# Altium PCB InvControlCardLayout.PcbDoc (part 1 of 2)
Units mil, origin at the board's own origin, x right, y up, seen from the top; angles counter-clockwise.
Board outline 9055.12 x 6692.91 mil, 4 copper layers (Top, GND PLANE, POWER PLANE, Bottom), stack 25.5 mil thick; 291 components, 194 nets, 954 pads, 275 vias.
Unrouted connection lines stored in the file: 3.
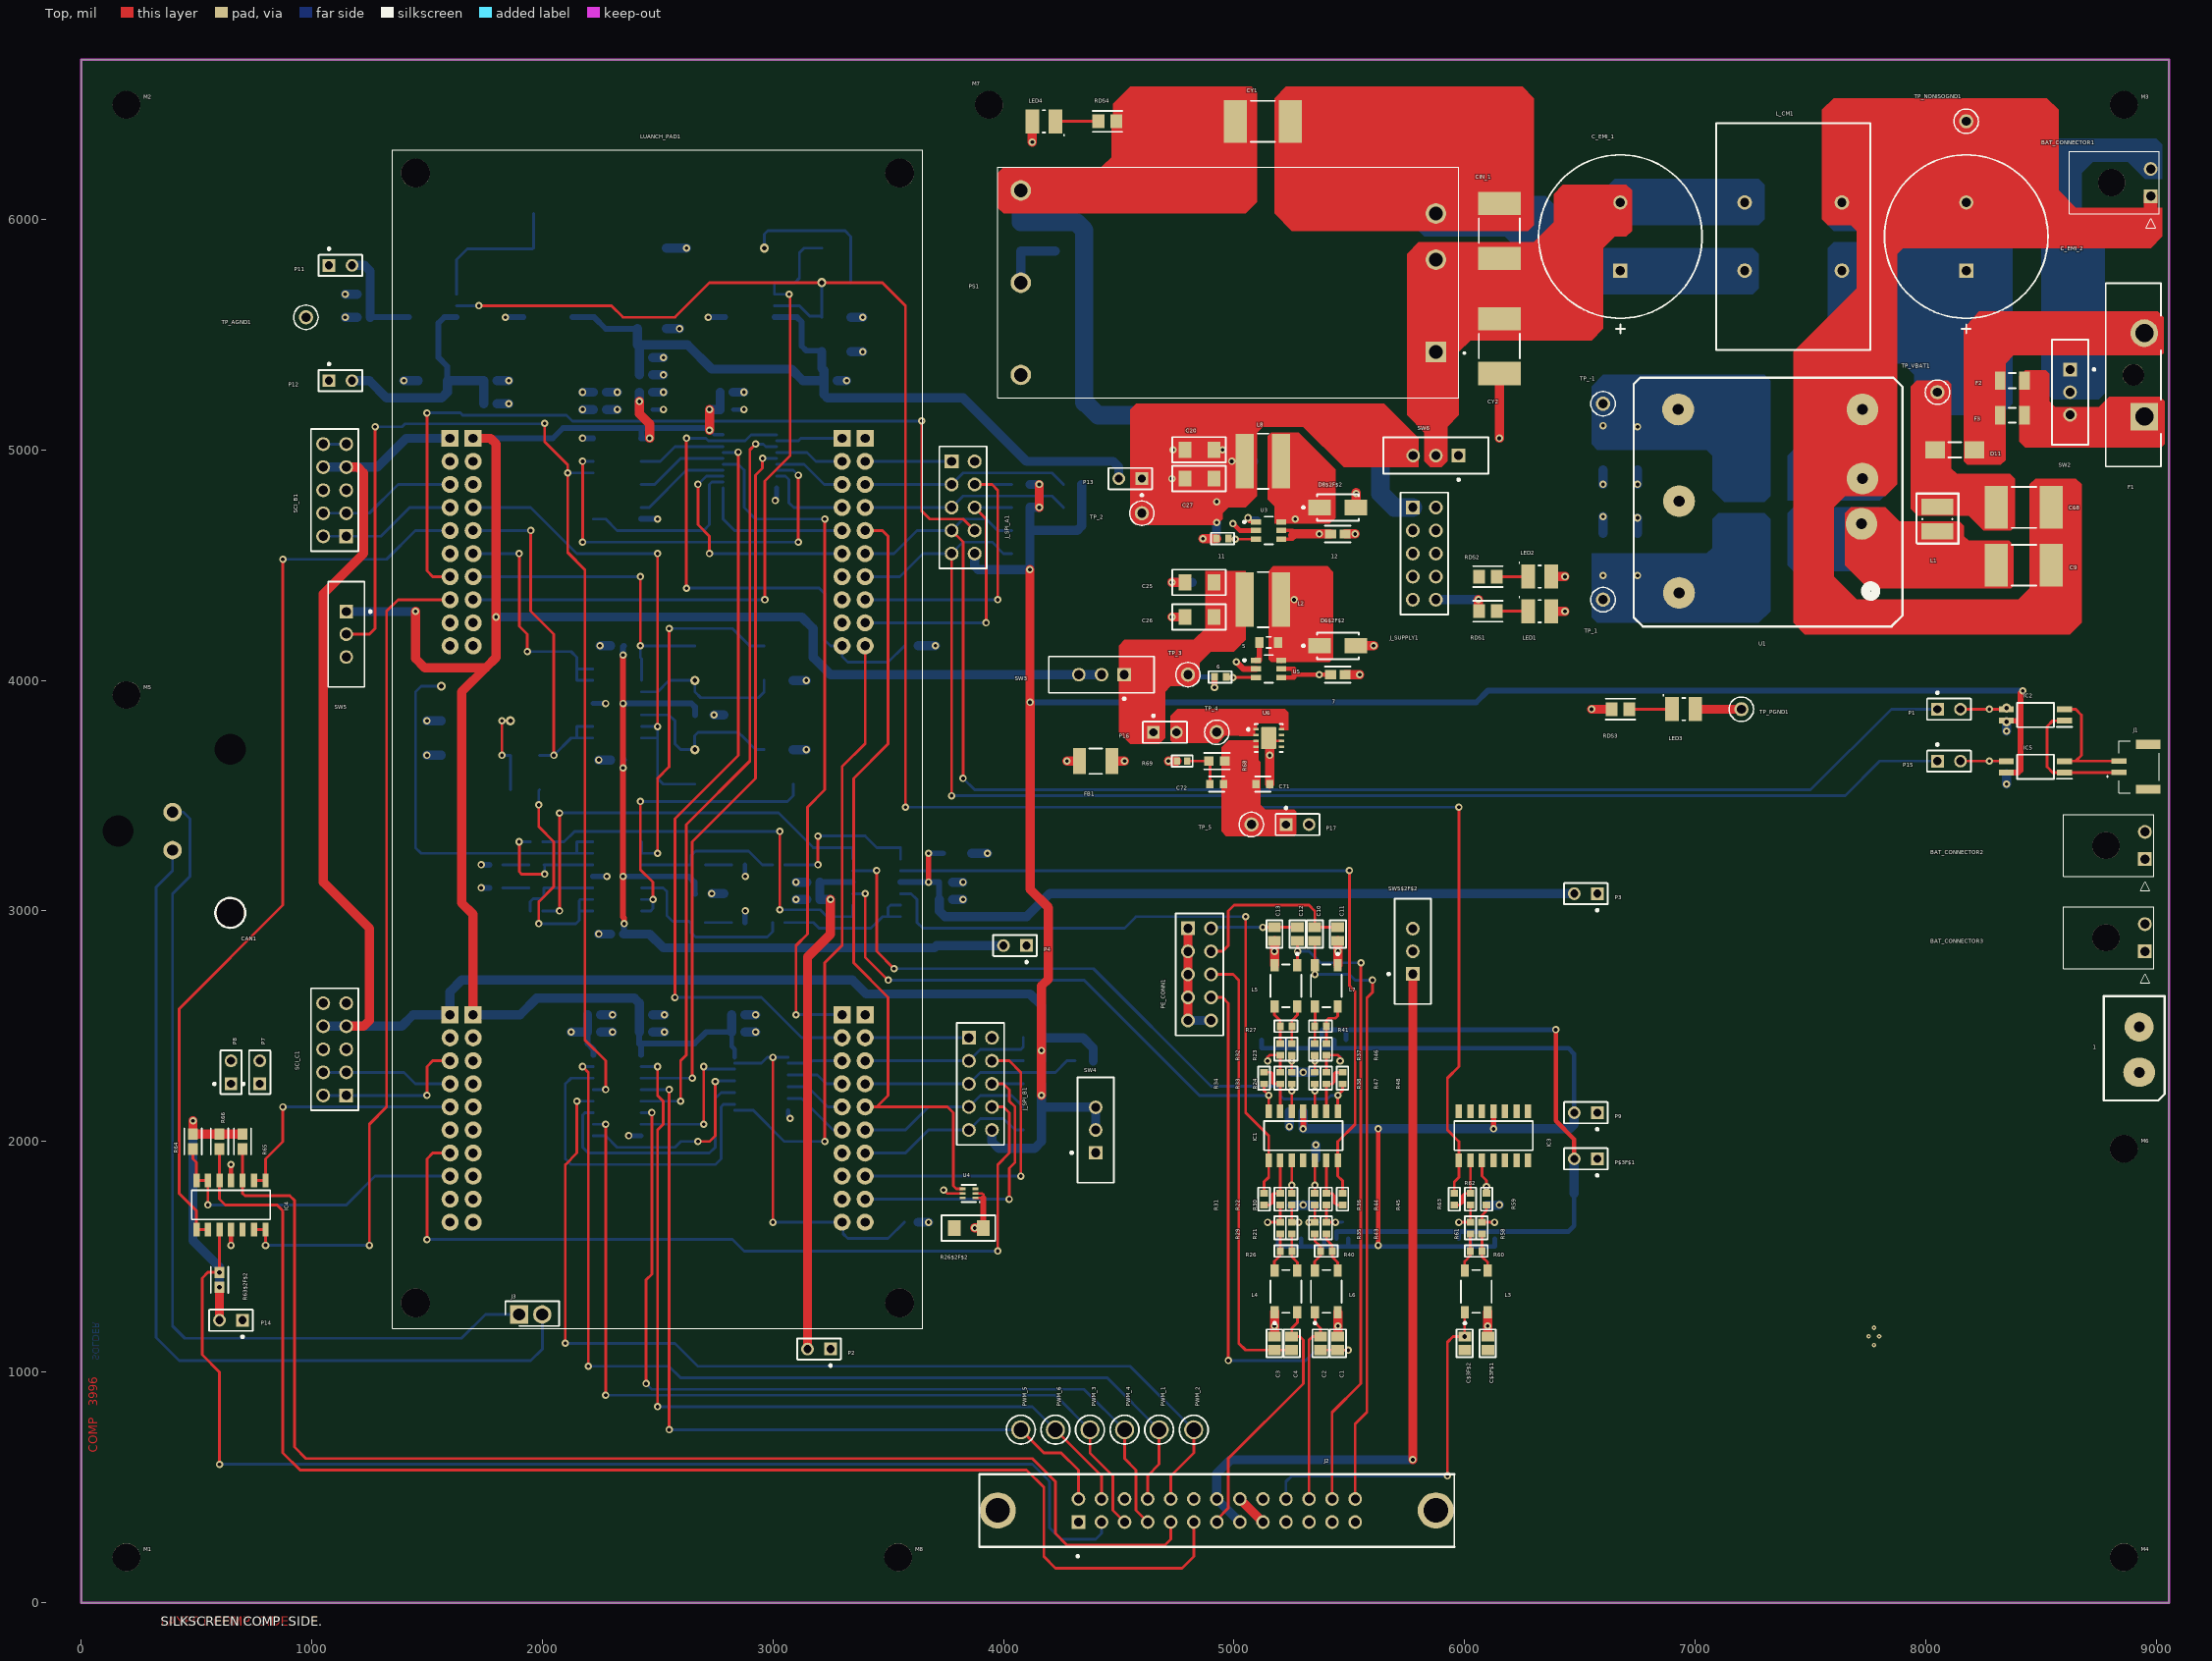
[diagram p0: Top view]
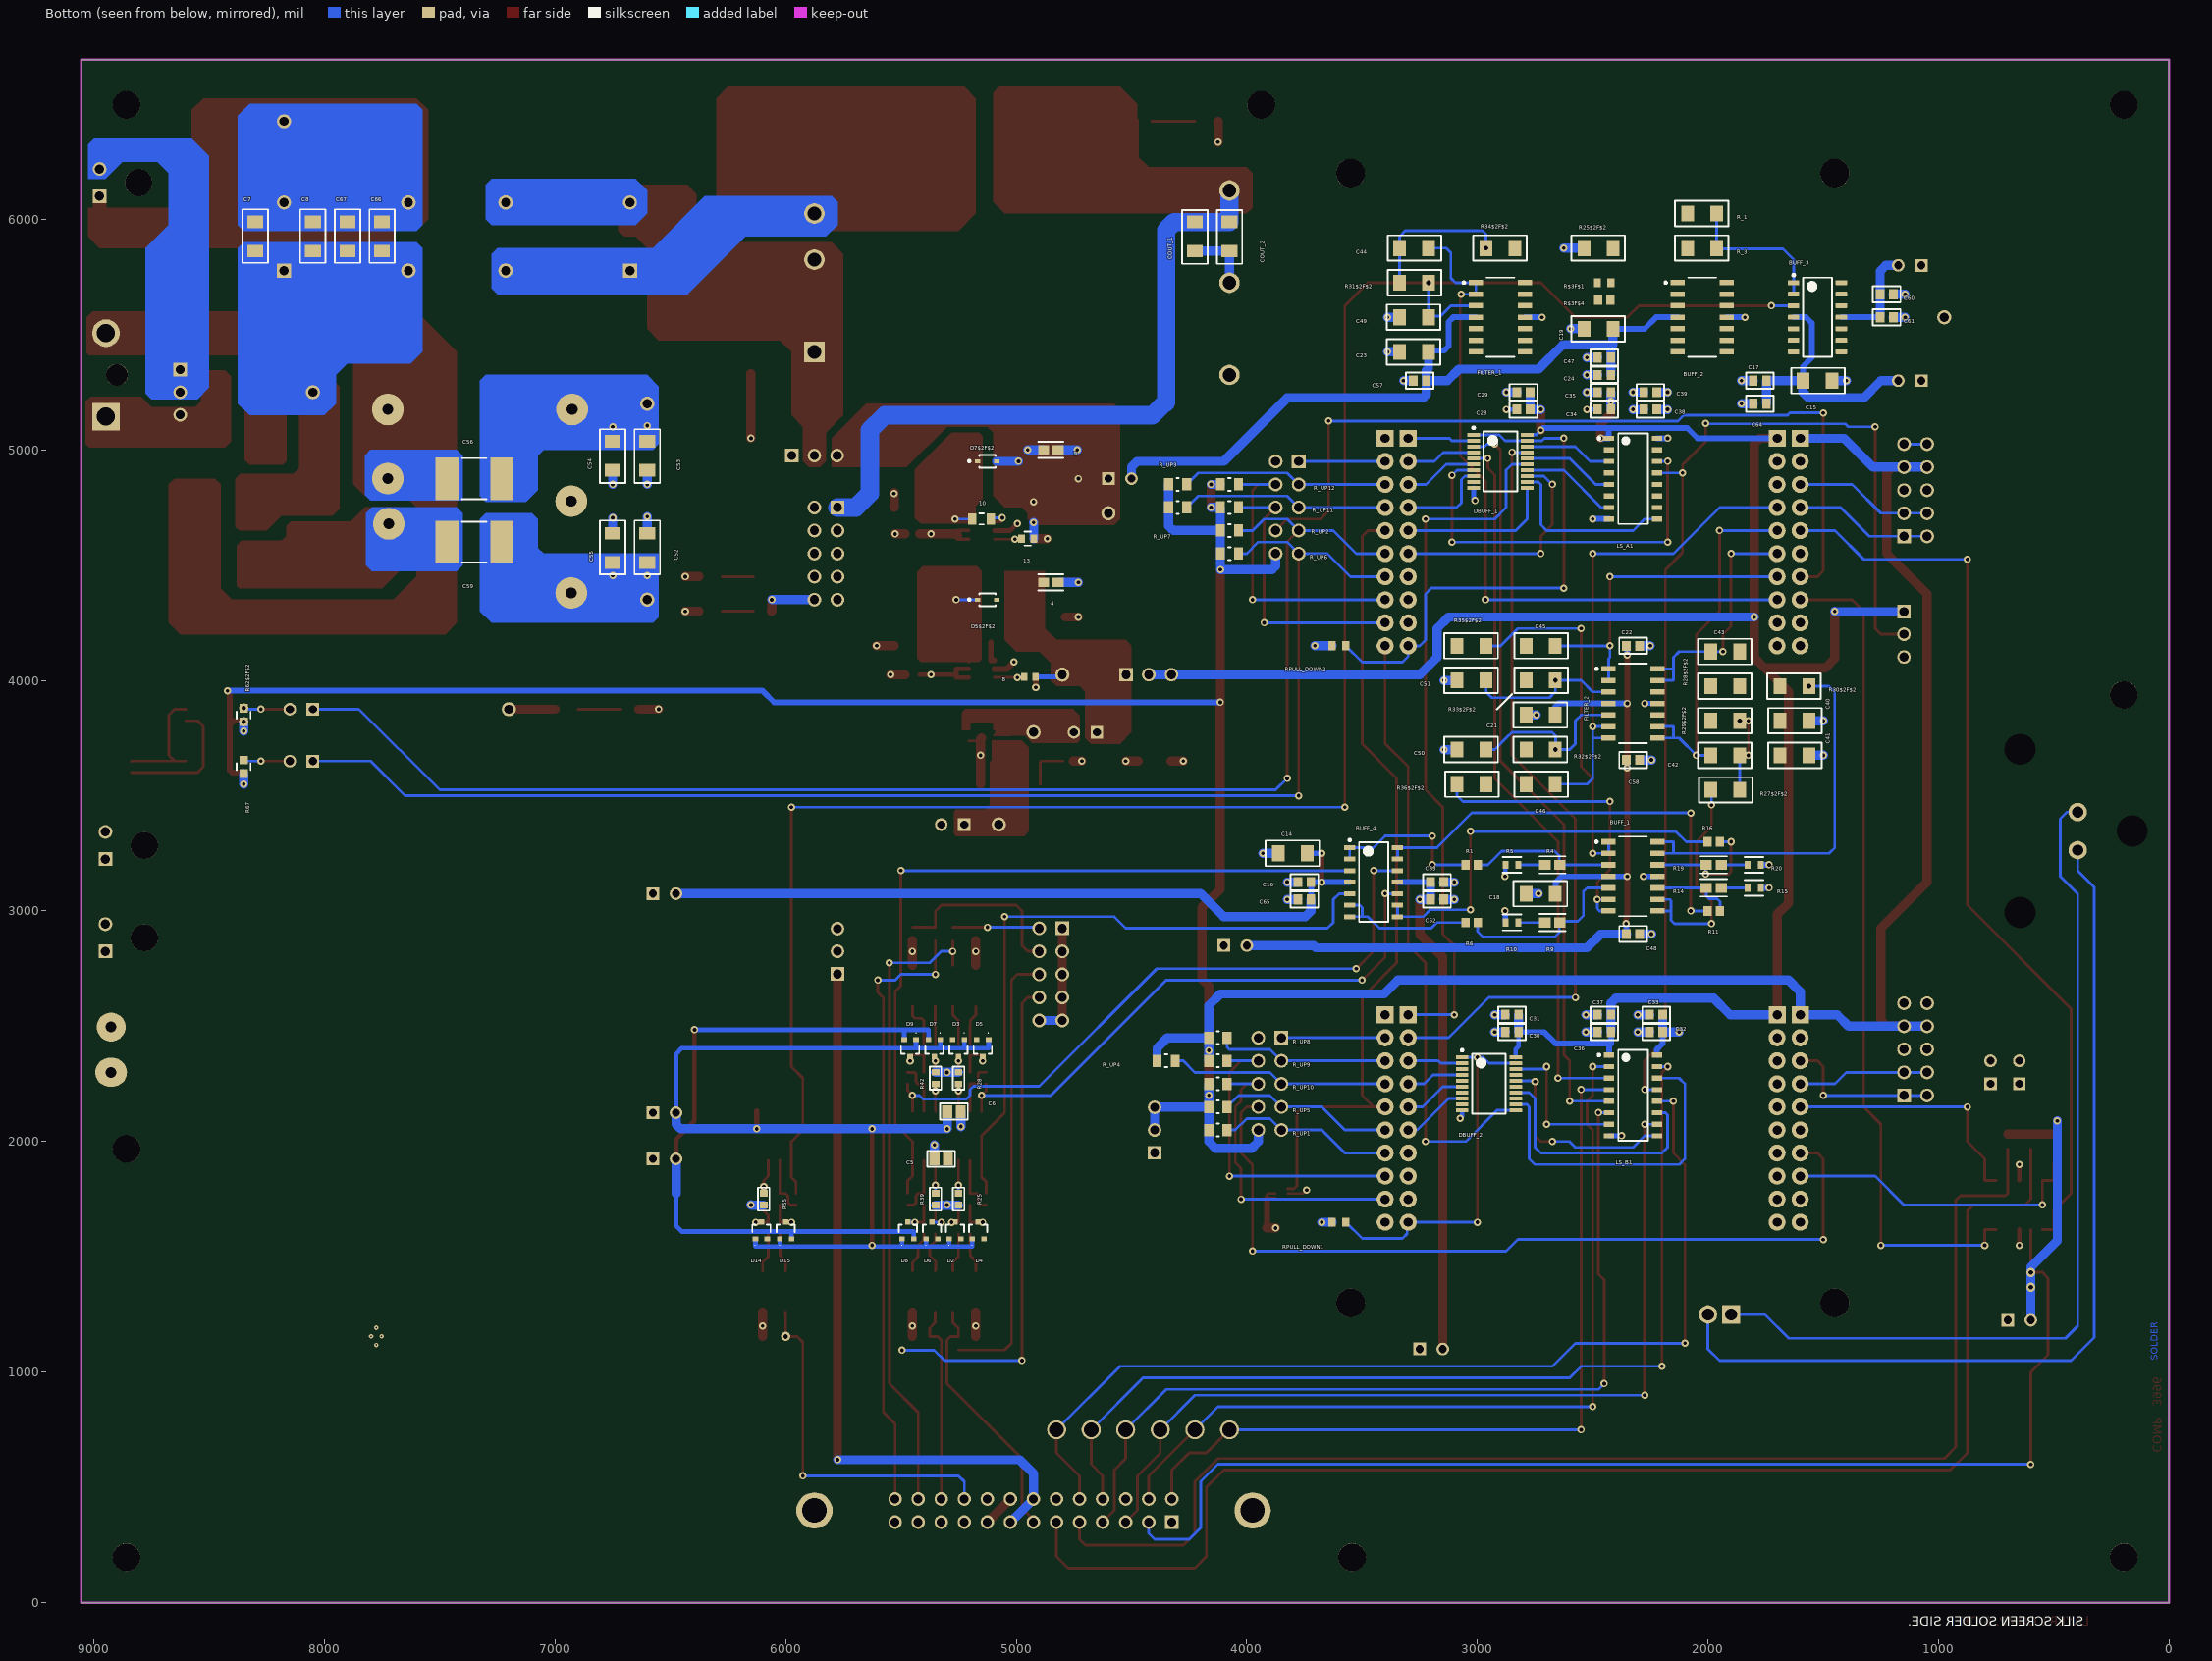
[diagram p1: Bottom view, seen from below]
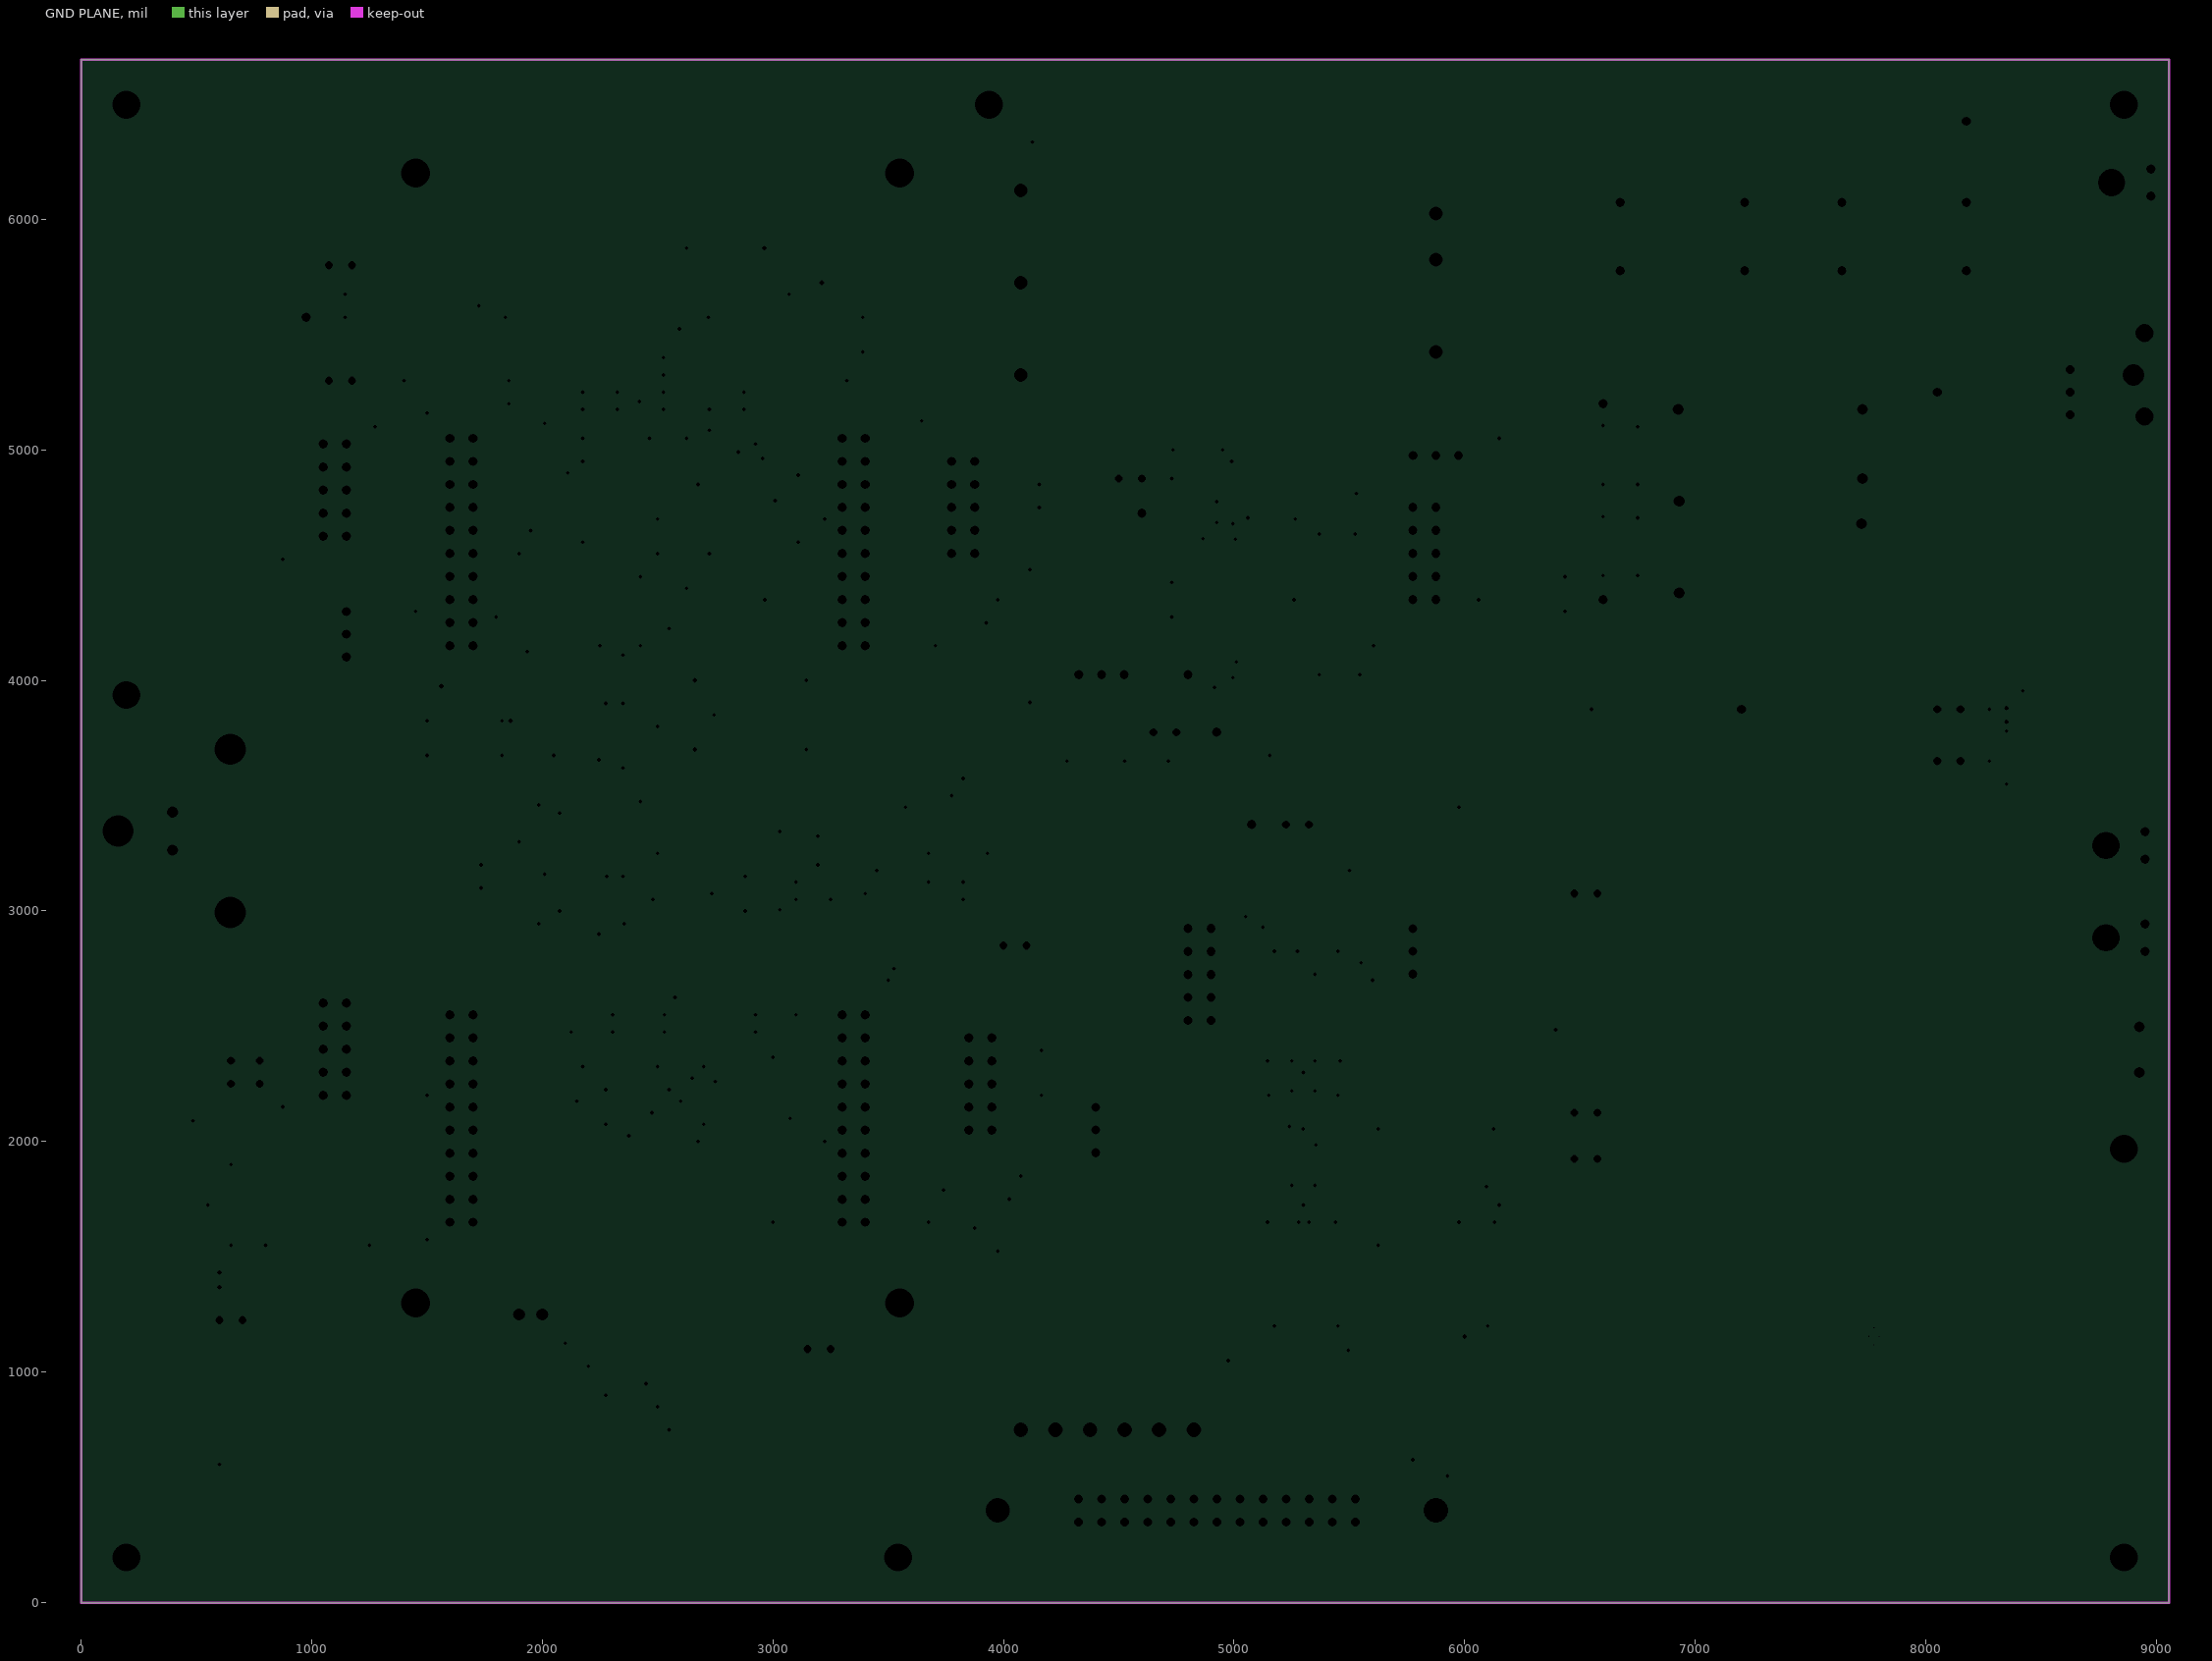
[diagram p2: GND PLANE, clearances drawn from the general rule]
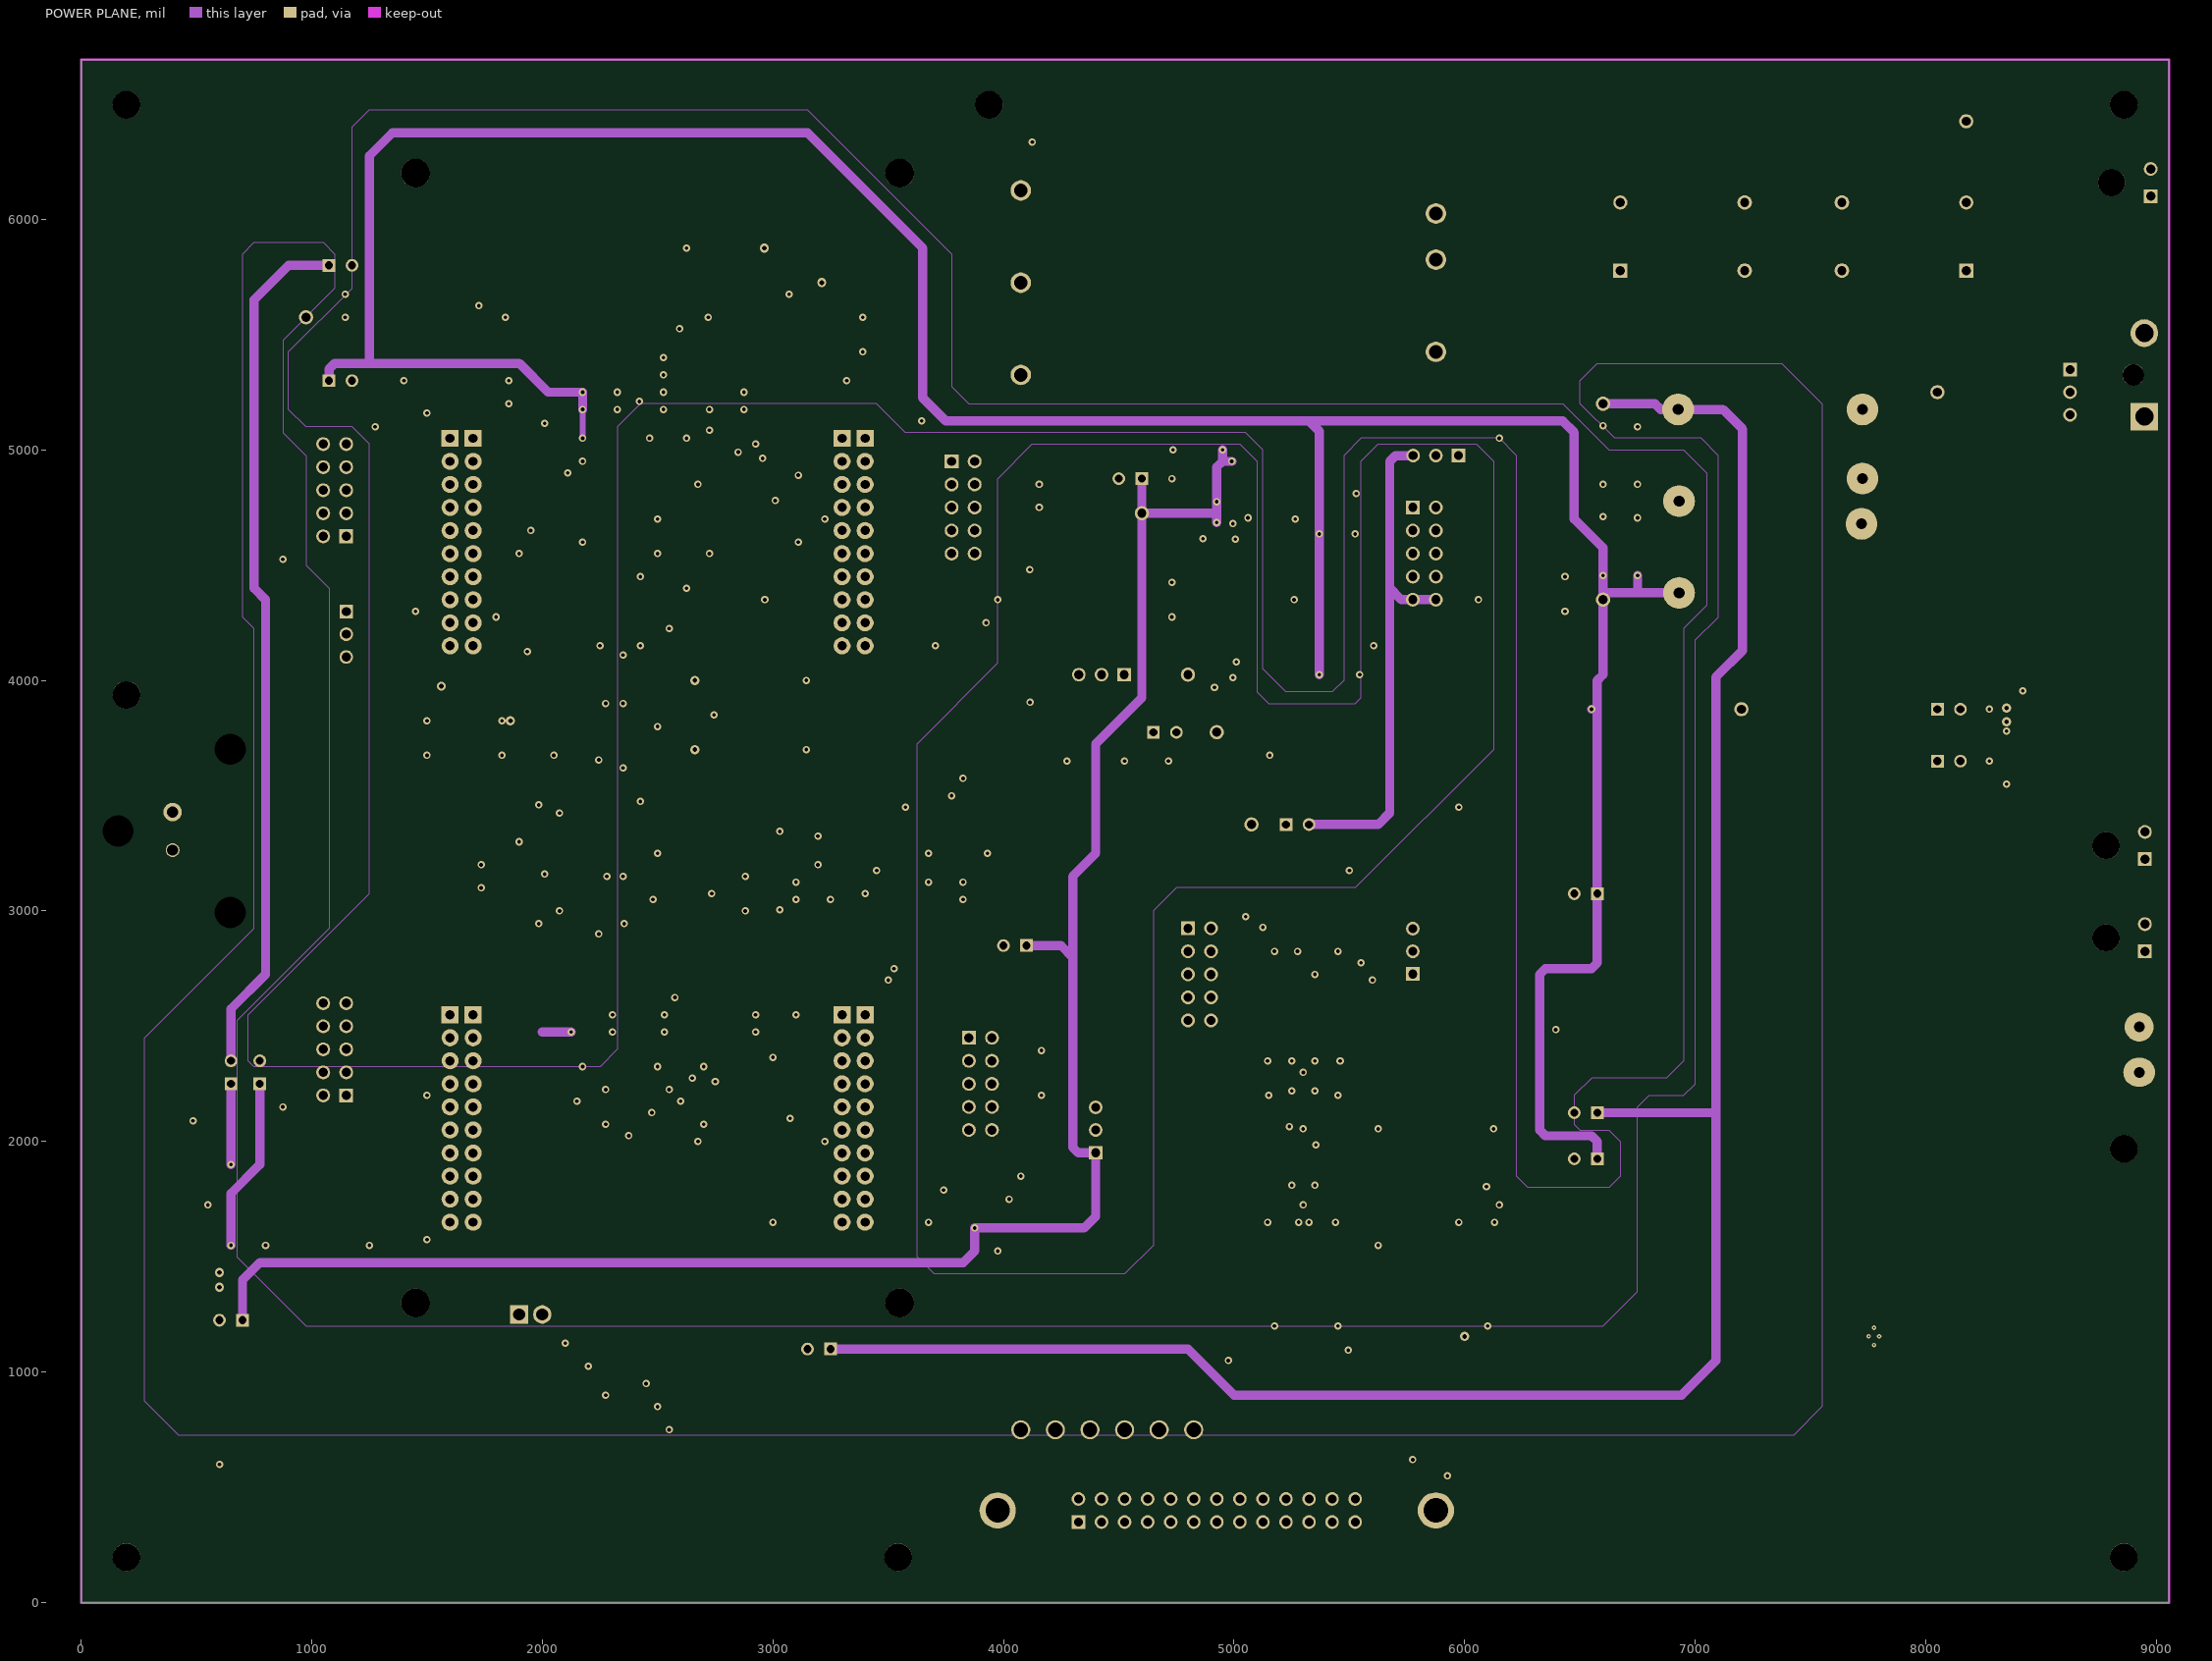
[diagram p3: POWER PLANE]

## Layer stack, top to bottom
Solder Mask Top: solder mask 0.4, Solder Resist, Dk 3.5
Top: signal copper 1.4
GND PLANE: plane copper 1.35
Dielectric2: dielectric 10, FR-4, Dk 4.3
POWER PLANE: signal copper 1.35
Dielectric3: dielectric 10, FR-4, Dk 4.3
Bottom: signal copper 1.4
Solder Mask Bottom: solder mask 0.4, Solder Resist, Dk 3.5

## Board outline
0,0 9055.12,0 9055.12,6692.91 0,6692.91

## Design rules (kind name [scope] priority, off if disabled: settings)
Clearance "Clearance - Default - DEFAULT - Via" [IsVia vs IsVia] p1: gap=12 ignorepadtopadclearanceinfootprint=FALSE
Clearance "Clearance - Default - DEFAULT- SMD" [IsVia vs IsSMTPin] p2: gap=12 ignorepadtopadclearanceinfootprint=FALSE
Clearance "Clearance - Default - DEFAULT - Net" [All] p3: gap=10 ignorepadtopadclearanceinfootprint=FALSE except(0: Arc-Hole Track-Hole SMDPad-Hole THPad-Hole Via-Hole Fill-Hole Poly-Hole Region-Hole Text-Hole; 20: SMDPad-Fill SMDPad-Poly SMDPad-Region THPad-Fill THPad-Poly THPad-Region Via-Fill Via-Poly Via-Region)
ComponentClearance "ComponentClearance - Default - DEFAULT" [All] p1: gap=10 collisioncheckmode=3 verticalgap=10 showdistances=FALSE
FanoutControl Fanout_SOIC [IsSOIC] p1: bgadir=Out bgaviamode=Centered fanoutstyle=Auto fanoutdirection=Alternating viagrid=1 // Fanout_SOIC (Default Rule)
FanoutControl Fanout_Small [(CompPinCount < 5)] p2: bgadir=Out bgaviamode=Centered fanoutstyle=Auto fanoutdirection=OutThenIn viagrid=1 // Fanout_Small (Default Rule)
FanoutControl Fanout_LCC [IsLCC] p3: bgadir=Out bgaviamode=Centered fanoutstyle=Auto fanoutdirection=Alternating viagrid=1 // Fanout_LCC (Default Rule)
FanoutControl Fanout_BGA [IsBGA] p4: bgadir=Out bgaviamode=Centered fanoutstyle=Auto fanoutdirection=Alternating viagrid=1 // Fanout_BGA (Default Rule)
HoleToHoleClearance "HoleToHoleClearance - Default - DEFAULT" [All] p1: gap=10 allowstackedmicrovias=TRUE
Length "Default Length" [All] p1: maxlimit=50000 minlimit=0
MaxMinImpedance "Default Impedance" [All] p1: minimum=50.00 maximum=150.0
ParallelSegment "Default Parallel Segment Adjasent" [All] p1: limit=1000 gap=200
ParallelSegment "Default Parallel Segment Same Layer" [All] p2: limit=1000 gap=200
PlaneClearance [All] p1: clearance=20
PlaneConnect "Default PlaneConnect" [All] p1: planeconnectstyle=Relief reliefexpansion=20 reliefentries=4 reliefconductorwidth=10 reliefairgap=10
PolygonConnect "PolygonConnect - Default SMT" [IsSMTPin] p1: connectstyle=Relief reliefconductorwidth=10 reliefentries=4 polygonreliefangle="45 Angle" airgapwidth=10
PolygonConnect "PolygonConnect - Default Pad" [All] p2: connectstyle=Relief reliefconductorwidth=10 reliefentries=4 polygonreliefangle="45 Angle" airgapwidth=10
RoutingLayers "RoutingLayers - Default - DEFAULT" [All] p1: top layer_v5=TRUE mid layer 1_v5=TRUE bottom layer_v5=TRUE
RoutingPriority "RoutingPriority - Default - DEFAULT" [All] p1: routingpriority=0
RoutingTopology "Default Routing Topology" [All] p1: topology=Shortest
RoutingVias "RoutingVias - Default - DEFAULT" [All] p1: holewidth=16 width=32 viastyle="Through Hole" minholewidth=16 minwidth=32 maxholewidth=16 maxwidth=32
SMDToCorner "SMDToCorner - Default - DEFAULT" [All] p1: distance=120000
SolderMaskExpansion "SolderMaskExpansion from CAM settings" [All] p1: expansion=5 istentingtop=FALSE
Width "Width - Net - PGND" [InNet('PGND')] p1: maxlimit=100 minlimit=10 preferedwidth=40
Width "Width - NetClass - ClearanceClass_2(RuleSet)" [InNetClass('ClearanceClass_2(RuleSet)')] p2: maxlimit=100 minlimit=10 preferedwidth=40
Width "Width - NetClass - ClearanceClass_4(RuleSet)" [InNetClass('ClearanceClass_4(RuleSet)')] p3: maxlimit=100 minlimit=10 preferedwidth=20
Width "Default Width" [All] p4: maxlimit=100 minlimit=10 preferedwidth=12
19 further rules are at their usual default settings.

## Classes and differential pairs
net class ClearanceClass_2(RuleSet): 3V3 3V3_C 3V3_L 3V3_L1 5V 5V_C 15V 15V_OUT 24V 24V_IPM +15_L +15_L1 -15_L -15_L1 -15V AGND GND_AUX NON_ISOGND V_BAT V_BAT_IN V_PROT
net class ClearanceClass_4(RuleSet): VCC+ VCC-

## Components (designator, comment, footprint, x,y, rotation, side; value= is the part's Value field where it differs from the comment)
1 "5.08MM_PITCH_CON2" 5.08MM_PITCH_CON2 8925,2300 r90 top
4 "FP-GRM188-0_1-E0_2_0_55-IPC_A" FP-GRM188-0_1-E0_2_0_55-IPC_A 4850,4425 r0 bottom
5 "FP-CGA3E-0_3-0_1-IPC_A" FP-CGA3E-0_3-0_1-IPC_A 5150,4165 r0 top
6 "RESC1609X55X30LL15T15" RESC1609X55X30LL15T15 4940,4015 r0 top
7 "FP-GRM188-0_1-E0_2_0_55-IPC_A" FP-GRM188-0_1-E0_2_0_55-IPC_A 5450,4025 r180 top
8 "RESC1608X55X30LL15T15" RESC1608X55X30LL15T15 4940,4015 r0 bottom
9 "FP-GRM188-0_1-E0_2_0_55-IPC_A" FP-GRM188-0_1-E0_2_0_55-IPC_A 4850,5000 r0 bottom
10 "FP-CGA3E-0_3-0_1-IPC_A" FP-CGA3E-0_3-0_1-IPC_A 5150,4700 r0 bottom
11 "RESC1609X55X30LL15T15" RESC1609X55X30LL15T15 4950,4615 r0 top
12 "FP-GRM188-0_1-E0_2_0_55-IPC_A" FP-GRM188-0_1-E0_2_0_55-IPC_A 5450,4635 r180 top
13 "RESC1608X55X30NL15T15$2F$2" RESC1608X55X30NL15T15$2F$2 4950,4615 r0 bottom
BAT_CONNECTOR1 "215760-YY02" 215760-YY02 8975,6100 r270 top
BAT_CONNECTOR2 "215760-YY02" 215760-YY02 8950,3225 r270 top
BAT_CONNECTOR3 "215760-YY02" 215760-YY02 8950,2825 r270 top
BUFF_1 "FP-D0014A-MFG" FP-D0014A-MFG 2325,3150 r180 bottom
BUFF_2 "FP-D0014A-MFG" FP-D0014A-MFG 2025,5575 r180 bottom
BUFF_3 "D0014A_L" D0014A_L 1525,5575 r180 bottom
BUFF_4 "D0014A_L" D0014A_L 3450,3125 r180 bottom
C1 "C0805" C0805 5450,1125 r90 top
C2 "C0805" C0805 5375,1125 r270 top
C3 "C0805" C0805 5175,1125 r90 top
C4 "C0805" C0805 5250,1125 r270 top
C5 "C0805" C0805 5325,1925 r0 bottom
C6 "C0805" C0805 5270,2130 r180 bottom
C7 "1206" 1206 8300,5925 r90 bottom
C8 "1206" 1206 8050,5925 r90 bottom
C9 "1812" 1812 8425,4500 r0 top
C10 "C0805" C0805 5350,2900 r90 top
C11 "C0805" C0805 5450,2900 r270 top
C12 "C0805" C0805 5275,2900 r90 top
C13 "C0805" C0805 5175,2900 r270 top
C14 "1206" 1206 3800,3250 r0 bottom
C15 "1206" 1206 1525,5300 r180 bottom
C16 "CAPC1608X92X38ML15T08" CAPC1608X92X38ML15T08 3750,3125 r180 bottom
C17 "CAPC1608X92X38ML15T08" CAPC1608X92X38ML15T08 1775,5300 r180 bottom
C18 "1206" 1206 2725,3075 r0 bottom
C19 "1206" 1206 2475,5525 r0 bottom
C20 "1206" 1206 4850,5000 r180 top
C21 "1206" 1206 2725,3850 r0 bottom
C22 "CAPC1608X92X38ML15T08" CAPC1608X92X38ML15T08 2325,4150 r0 bottom
C23 "1206" 1206 3275,5425 r0 bottom
C24 "CAPC1608X92X38ML15T08" CAPC1608X92X38ML15T08 2450,5325 r180 bottom
C25 "1206" 1206 4850,4425 r180 top
C26 "1206" 1206 4850,4275 r180 top
C27 "1206" 1206 4850,4875 r180 top
C28 "CAPC1608X92X38ML15T08" CAPC1608X92X38ML15T08 2800,5175 r180 bottom
C29 "CAPC1608X92X38ML15T08" CAPC1608X92X38ML15T08 2800,5250 r180 bottom
C30 "CAPC1608X92X38ML15T08" CAPC1608X92X38ML15T08 2850,2475 r180 bottom
C31 "CAPC1608X92X38ML15T08" CAPC1608X92X38ML15T08 2850,2550 r180 bottom
C32 "CAPC1608X92X38ML15T08" CAPC1608X92X38ML15T08 2225,2475 r180 bottom
C33 "CAPC1608X92X38ML15T08" CAPC1608X92X38ML15T08 2225,2550 r180 bottom
C34 "CAPC1608X92X38ML15T08" CAPC1608X92X38ML15T08 2450,5175 r180 bottom
C35 "CAPC1608X92X38ML15T08" CAPC1608X92X38ML15T08 2450,5250 r180 bottom
C36 "CAPC1608X92X38ML15T08" CAPC1608X92X38ML15T08 2450,2475 r180 bottom
C37 "CAPC1608X92X38ML15T08" CAPC1608X92X38ML15T08 2450,2550 r180 bottom
C38 "CAPC1608X92X38ML15T08" CAPC1608X92X38ML15T08 2250,5175 r180 bottom
C39 "CAPC1608X92X38ML15T08" CAPC1608X92X38ML15T08 2250,5250 r180 bottom
C40 "1206" 1206 1625,3825 r180 bottom
C41 "1206" 1206 1625,3675 r180 bottom
C42 "1206" 1206 1925,3675 r0 bottom
C43 "1206" 1206 1925,4125 r0 bottom
C44 "1206" 1206 3275,5875 r180 bottom
C45 "1206" 1206 2725,4150 r180 bottom
C46 "1206" 1206 2725,3550 r180 bottom
C47 "CAPC1608X92X38ML15T08" CAPC1608X92X38ML15T08 2450,5400 r180 bottom
C48 "CAPC1608X92X38ML15T08" CAPC1608X92X38ML15T08 2325,2900 r0 bottom
C49 "1206" 1206 3275,5575 r0 bottom
C50 "1206" 1206 3025,3700 r0 bottom
C51 "1206" 1206 3025,4000 r0 bottom
C52 "1206" 1206 6600,4575 r90 bottom
C53 "1206" 1206 6600,4975 r270 bottom
C54 "1206" 1206 6750,4975 r270 bottom
C55 "1206" 1206 6750,4575 r90 bottom
C56 "1812" 1812 7350,4875 r180 bottom
C57 "CAPC1608X92X38ML15T08" CAPC1608X92X38ML15T08 3250,5300 r180 bottom
C58 "CAPC1608X92X38ML15T08" CAPC1608X92X38ML15T08 2325,3655 r0 bottom
C59 "1812" 1812 7350,4600 r180 bottom
C60 "CAPC1608X92X38ML15T08" CAPC1608X92X38ML15T08 1225,5675 r0 bottom
C61 "CAPC1608X92X38ML15T08" CAPC1608X92X38ML15T08 1225,5575 r0 bottom
C62 "CAPC1608X92X38ML15T08" CAPC1608X92X38ML15T08 3175,3050 r0 bottom
C63 "CAPC1608X92X38ML15T08" CAPC1608X92X38ML15T08 3175,3125 r0 bottom
C64 "CAPC1608X92X38ML15T08" CAPC1608X92X38ML15T08 1775,5200 r180 bottom
C65 "CAPC1608X92X38ML15T08" CAPC1608X92X38ML15T08 3750,3050 r180 bottom
C66 "1206" 1206 7750,5925 r90 bottom
C67 "1206" 1206 7900,5925 r90 bottom
C68 "1812" 1812 8425,4750 r0 top
C71 "FP-CC0603-DA-MFG" FP-CC0603-DA-MFG 5125,3550 r0 top
C72 "FP-CC0603-0_9-MFG" FP-CC0603-0_9-MFG 4925,3550 r180 top
C$3F$1 "C0805" C0805 6100,1125 r90 top
C$3F$2 "C0805" C0805 6000,1125 r270 top
C_EMI_1 "CAPPR80-750-2000X1800X2200" CAPPR80-750-2000X1800X2200 6675,5925 r90 top
C_EMI_2 "CAPPR80-750-2000X1800X2200" CAPPR80-750-2000X1800X2200 8175,5925 r90 top
CAN1 "PCBCOMPONENT_1" PCBCOMPONENT_1 393.7,3346.46 r90 top
CIN_1 "1812" 1812 6150,5950 r90 top
COUT_1 "1206" 1206 4225,5925 r270 bottom
COUT_2 "1206" 1206 4075,5925 r270 bottom
CY1 "1812" 1812 5125,6425 r180 top
CY2 "1812" 1812 6150,5450 r270 top
D2 "BAV99W115" BAV99W115 5265,1615 r180 bottom
D3 "BAV99W115" BAV99W115 5250,2405 r0 bottom
D4 "BAV99W115" BAV99W115 5165,1615 r180 bottom
D5 "BAV99W115" BAV99W115 5145,2405 r0 bottom
D5$2F$2 "FP-SOD323-MFG" FP-SOD323-MFG 5125,4350 r180 bottom
D6 "BAV99W115" BAV99W115 5365,1615 r180 bottom
D6$2F$2 "FP-SMA-MFG" FP-SMA-MFG 5450,4150 r0 top
D7 "BAV99W115" BAV99W115 5355,2405 r0 bottom
D7$2F$2 "FP-SOD323-MFG" FP-SOD323-MFG 5125,4950 r180 bottom
D8 "BAV99W115" BAV99W115 5470,1615 r180 bottom
D8$2F$2 "FP-SMA-MFG" FP-SMA-MFG 5450,4750 r0 top
D9 "BAV99W115" BAV99W115 5460,2405 r0 bottom
D11 "DIODE" DIODE 8125,5000 r180 top
D14 "BAV99W115" BAV99W115 6105,1615 r180 bottom
D15 "BAV99W115" BAV99W115 6000,1615 r180 bottom
DBUFF_1 "PW0020A_N" PW0020A_N 2900,4950 r180 bottom
DBUFF_2 "PW0020A_N" PW0020A_N 2950,2250 r180 bottom
F1 "FP-178_6164_0001-MFG" FP-178_6164_0001-MFG 8900,5325 r90 top
F2 "FP-0466-MFG" FP-0466-MFG 8375,5300 r180 top
F3 "FP-0466-MFG" FP-0466-MFG 8375,5150 r180 top
FB1 "FP-FBMH3225-MFG" FP-FBMH3225-MFG 4400,3650 r0 top
FILTER_1 "FP-D0014A-MFG" FP-D0014A-MFG 2900,5575 r180 bottom
FILTER_2 "FP-D0014A-MFG" FP-D0014A-MFG 2325,3900 r180 bottom
IC1 "SOIC127P600X175-14N" SOIC127P600X175-14N 5300,2025 r90 top
IC2 "SOIC127P700X210-4N" SOIC127P700X210-4N 8475,3850 r180 top
IC3 "SOIC127P600X175-14N" SOIC127P600X175-14N 6125,2025 r90 top
IC4 "SOIC127P600X175-14N" SOIC127P600X175-14N 650,1725 r90 top
IC5 "SOIC127P700X210-4N" SOIC127P700X210-4N 8475,3625 r180 top
J1 "5023860271" 5023860271 8925,3625 r270 top
J2 "2-5499206-6" 2-5499206-6 4925,400 r0 top
J3 "RHDR2W80P0X254_1X2_558X254X850P" RHDR2W80P0X254_1X2_558X254X850P 1900,1250 r0 top
J_SPI_A1 "61301021821" 61301021821 3825,4750 r270 top
J_SPI_B1 "61301021821" 61301021821 3900,2250 r270 top
J_SUPPLY1 "61301021821" 61301021821 5825,4550 r270 top
L1 "INDUCTOR" INDUCTOR 8050,4700 r270 top
L2 "MSS6132223MLC" MSS6132223MLC 5125,4350 r90 top
L3 "FP-ACT45B-MFG" FP-ACT45B-MFG 6050,1350 r90 top
L4 "FP-ACT45B-MFG" FP-ACT45B-MFG 5225,1350 r90 top
L5 "FP-ACT45B-MFG" FP-ACT45B-MFG 5225,2675 r270 top
L6 "FP-ACT45B-MFG" FP-ACT45B-MFG 5400,1350 r90 top
L7 "FP-ACT45B-MFG" FP-ACT45B-MFG 5400,2675 r270 top
L8 "MSS6132223MLC" MSS6132223MLC 5125,4950 r90 top
L_CM1 "WE-CMB-M" WE-CMB-M 7425,5925 r90 top
LED1 "DIOC3225X06N" DIOC3225X06N 6325,4300 r0 top
LED2 "DIOC3225X06N" DIOC3225X06N 6325,4450 r0 top
LED3 "DIOC3225X06N" DIOC3225X06N 6950,3875 r0 top
LED4 "DIOC3225X06N" DIOC3225X06N 4175,6425 r180 top
LS_A1 "FP-751B-05-MFG" FP-751B-05-MFG 2325,4875 r180 bottom
LS_B1 "FP-751B-05-MFG" FP-751B-05-MFG 2325,2200 r180 bottom
LUANCH_PAD1 "PCBCOMPONENT_1$2F$2" PCBCOMPONENT_1$2F$2 1700,1650 r270 top
M1 "MT140" MT140 196.85,196.85 r0 top
M2 "MT140" MT140 196.85,6496.06 r0 top
M3 "MT140" MT140 8858.27,6496.06 r0 top
M4 "MT140" MT140 8858.27,196.85 r0 top
M5 "MT140" MT140 196.85,3937.01 r0 top
M6 "MT140" MT140 8858.27,1968.5 r0 top
M7 "MT140" MT140 3937.01,6496.06 r0 top
M8 "MT140" MT140 3543.31,196.85 r0 top
P1 "TECO-5-146280-2_V" TECO-5-146280-2_V 8100,3875 r0 top
P2 "TECO-5-146280-2_V" TECO-5-146280-2_V 3200,1100 r180 top
P3 "TECO-5-146280-2_V" TECO-5-146280-2_V 6525,3075 r180 top
P4 "TECO-5-146280-2_V" TECO-5-146280-2_V 4050,2850 r180 top
P7 "TECO-5-146280-2_V" TECO-5-146280-2_V 775,2300 r90 top
P8 "TECO-5-146280-2_V" TECO-5-146280-2_V 650,2300 r90 top
P9 "TECO-5-146280-2_V" TECO-5-146280-2_V 6525,2125 r180 top
P11 "TECO-5-146280-2_V" TECO-5-146280-2_V 1125,5800 r0 top
P12 "TECO-5-146280-2_V" TECO-5-146280-2_V 1125,5300 r0 top
P13 "TECO-5-146280-2_V" TECO-5-146280-2_V 4550,4875 r180 top
P14 "TECO-5-146280-2_V" TECO-5-146280-2_V 650,1225 r180 top
P15 "TECO-5-146280-2_V" TECO-5-146280-2_V 8100,3650 r0 top
P16 "TECO-5-146280-2_V" TECO-5-146280-2_V 4700,3775 r0 top
P17 "TECO-5-146280-2_V" TECO-5-146280-2_V 5275,3375 r0 top
P$3F$1 "TECO-5-146280-2_V" TECO-5-146280-2_V 6525,1925 r180 top
PE_CONN1 "61301021821" 61301021821 4850,2725 r270 top
PS1 "CONV_PQAE50-D24-S24-D" CONV_PQAE50-D24-S24-D 4975,5725 r180 top
PWM_1 "KSTN-5012_V" KSTN-5012_V 4675,750 r0 top
PWM_2 "KSTN-5012_V" KSTN-5012_V 4825,750 r0 top
PWM_3 "KSTN-5012_V" KSTN-5012_V 4375,750 r0 top
PWM_4 "KSTN-5012_V" KSTN-5012_V 4525,750 r0 top
PWM_5 "KSTN-5012_V" KSTN-5012_V 4075,750 r0 top
PWM_6 "KSTN-5012_V" KSTN-5012_V 4225,750 r0 top
R1 "RESC1609X50X30ML10T20" RESC1609X50X30ML10T20 3025,3200 r180 bottom
R4 "FP-ERA3A-IPC_A" FP-ERA3A-IPC_A 2675,3200 r180 bottom
R5 "FP-ERJ-3GEY0R00V-MFG" FP-ERJ-3GEY0R00V-MFG 2850,3200 r180 bottom
R6 "RESC1609X50X30ML10T20" RESC1609X50X30ML10T20 3025,2950 r180 bottom
R9 "FP-ERA3A-IPC_A" FP-ERA3A-IPC_A 2675,2950 r180 bottom
R10 "FP-ERJ-3GEY0R00V-MFG" FP-ERJ-3GEY0R00V-MFG 2850,2950 r180 bottom
R11 "RESC1609X50X30ML10T20" RESC1609X50X30ML10T20 1975,3000 r180 bottom
R14 "FP-ERA3A-IPC_A" FP-ERA3A-IPC_A 1975,3100 r0 bottom
R15 "FP-ERJ-3GEY0R00V-MFG" FP-ERJ-3GEY0R00V-MFG 1800,3100 r0 bottom
R16 "RESC1609X50X30ML10T20" RESC1609X50X30ML10T20 1975,3300 r180 bottom
R19 "FP-ERA3A-IPC_A" FP-ERA3A-IPC_A 1975,3200 r0 bottom
R20 "FP-ERJ-3GEY0R00V-MFG" FP-ERJ-3GEY0R00V-MFG 1800,3200 r0 bottom
R21 "RESC1609X55X30LL15T15" RESC1609X55X30LL15T15 5250,1625 r90 top
R22 "RESC1609X55X30LL15T15" RESC1609X55X30LL15T15 5250,1750 r90 top
R23 "RESC1609X55X30LL15T15" RESC1609X55X30LL15T15 5250,2400 r270 top
R24 "RESC1609X55X30LL15T15" RESC1609X55X30LL15T15 5250,2275 r270 top
R25 "RESC1609X55X30LL15T15" RESC1609X55X30LL15T15 5250,1750 r90 bottom
R25$2F$2 "1206" 1206 2475,5875 r0 bottom
R26 "RESC1609X55X30LL15T15" RESC1609X55X30LL15T15 5225,1525 r0 top
R26$2F$2 "1206" 1206 3850,1625 r180 top
R27 "RESC1609X55X30LL15T15" RESC1609X55X30LL15T15 5225,2500 r0 top
R27$2F$2 "1206" 1206 1925,3525 r180 bottom
R28 "RESC1609X55X30LL15T15" RESC1609X55X30LL15T15 5250,2275 r270 bottom
R28$2F$2 "1206" 1206 1925,3975 r0 bottom
R29 "RESC1609X55X30LL15T15" RESC1609X55X30LL15T15 5200,1625 r90 top
R29$2F$2 "1206" 1206 1925,3825 r0 bottom
R30 "RESC1609X55X30LL15T15" RESC1609X55X30LL15T15 5200,1750 r90 top
R30$2F$2 "1206" 1206 1625,3975 r0 bottom
R31 "RESC1609X55X30LL15T15" RESC1609X55X30LL15T15 5130,1750 r90 top
R31$2F$2 "1206" 1206 3275,5725 r180 bottom
R32 "RESC1609X55X30LL15T15" RESC1609X55X30LL15T15 5200,2400 r270 top
R32$2F$2 "1206" 1206 2725,3700 r0 bottom
R33 "RESC1609X55X30LL15T15" RESC1609X55X30LL15T15 5200,2275 r270 top
R33$2F$2 "1206" 1206 2725,4000 r180 bottom
R34 "RESC1609X55X30LL15T15" RESC1609X55X30LL15T15 5130,2275 r270 top
R34$2F$2 "1206" 1206 2900,5875 r0 bottom
R35 "RESC1609X55X30LL15T15" RESC1609X55X30LL15T15 5350,1625 r90 top
R35$2F$2 "1206" 1206 3025,4150 r0 bottom
R36 "RESC1609X55X30LL15T15" RESC1609X55X30LL15T15 5350,1750 r90 top
R36$2F$2 "1206" 1206 3025,3550 r180 bottom
R37 "RESC1609X55X30LL15T15" RESC1609X55X30LL15T15 5350,2400 r270 top
R38 "RESC1609X55X30LL15T15" RESC1609X55X30LL15T15 5350,2275 r270 top
R39 "RESC1609X55X30LL15T15" RESC1609X55X30LL15T15 5350,1750 r90 bottom
R40 "RESC1609X55X30LL15T15" RESC1609X55X30LL15T15 5400,1525 r180 top
R41 "RESC1609X55X30LL15T15" RESC1609X55X30LL15T15 5375,2500 r180 top
R42 "RESC1609X55X30LL15T15" RESC1609X55X30LL15T15 5350,2275 r270 bottom
R43 "RESC1609X55X30LL15T15" RESC1609X55X30LL15T15 5400,1625 r90 top
R44 "RESC1609X55X30LL15T15" RESC1609X55X30LL15T15 5400,1750 r90 top
R45 "RESC1609X55X30LL15T15" RESC1609X55X30LL15T15 5470,1750 r90 top
R46 "RESC1609X55X30LL15T15" RESC1609X55X30LL15T15 5400,2400 r270 top
R47 "RESC1609X55X30LL15T15" RESC1609X55X30LL15T15 5400,2275 r270 top
R48 "RESC1609X55X30LL15T15" RESC1609X55X30LL15T15 5470,2275 r270 top
R55 "RESC1609X55X30LL15T15" RESC1609X55X30LL15T15 6095,1750 r270 bottom
R58 "RESC1609X55X30LL15T15" RESC1609X55X30LL15T15 6075,1625 r90 top
R59 "RESC1609X55X30LL15T15" RESC1609X55X30LL15T15 6095,1750 r90 top
R60 "RESC1609X55X30LL15T15" RESC1609X55X30LL15T15 6050,1525 r0 top
R61 "RESC1609X55X30LL15T15" RESC1609X55X30LL15T15 6025,1625 r90 top
R62 "RESC1609X55X30LL15T15" RESC1609X55X30LL15T15 6025,1750 r90 top
R62$2F$2 "RESC1608X55X30NL15T15" RESC1608X55X30NL15T15 8350,3850 r90 bottom
R63 "RESC1609X55X30LL15T15" RESC1609X55X30LL15T15 5955,1750 r90 top
R63$2F$2 "FP-ERA3A-IPC_A" FP-ERA3A-IPC_A 600,1400 r270 top
R64 "FP-ERA3A-IPC_A" FP-ERA3A-IPC_A 485,2000 r90 top
R65 "FP-ERA3A-IPC_A" FP-ERA3A-IPC_A 700,2000 r90 top
R66 "FP-ERA3A-IPC_A" FP-ERA3A-IPC_A 600,2000 r90 top
R67 "RESC1608X55X30NL15T15" RESC1608X55X30NL15T15 8350,3625 r90 bottom
R68 "FP-RC0603-0_55-IPC_A" FP-RC0603-0_55-IPC_A 4925,3650 r0 top
R69 "RESC1609X50X30LL10T20" RESC1609X50X30LL10T20 4775,3650 r0 top
R$3F$1 "RESC1608X55X25ML10T15" RESC1608X55X25ML10T15 2450,5725 r180 bottom
R$3F$4 "RESC1609X50X30ML10T20" RESC1609X50X30ML10T20 2450,5650 r180 bottom
R_1 "1206" 1206 2025,6025 r0 bottom
R_3 "1206" 1206 2025,5875 r0 bottom
R_UP1 "FP-RN732A-MFG" FP-RN732A-MFG 4125,2050 r0 bottom
R_UP2 "FP-RN732A-MFG" FP-RN732A-MFG 4075,4650 r0 bottom
R_UP3 "FP-RN732A-MFG" FP-RN732A-MFG 4300,4850 r0 bottom
R_UP4 "FP-RN732A-MFG" FP-RN732A-MFG 4350,2350 r0 bottom
R_UP5 "FP-RN732A-MFG" FP-RN732A-MFG 4125,2150 r0 bottom
R_UP6 "FP-RN732A-MFG" FP-RN732A-MFG 4075,4550 r0 bottom
R_UP7 "FP-RN732A-MFG" FP-RN732A-MFG 4300,4750 r0 bottom
R_UP8 "FP-RN732A-MFG" FP-RN732A-MFG 4125,2450 r0 bottom
R_UP9 "FP-RN732A-MFG" FP-RN732A-MFG 4125,2350 r0 bottom
R_UP10 "FP-RN732A-MFG" FP-RN732A-MFG 4125,2250 r0 bottom
R_UP11 "FP-RN732A-MFG" FP-RN732A-MFG 4075,4750 r0 bottom
R_UP12 "FP-RN732A-MFG" FP-RN732A-MFG 4075,4850 r0 bottom
RDS1 "FP-RP732A-IPC_A" FP-RP732A-IPC_A 6100,4300 r180 top
RDS2 "FP-RP732A-IPC_A" FP-RP732A-IPC_A 6100,4450 r180 top
RDS3 "FP-RP732A-IPC_A" FP-RP732A-IPC_A 6675,3875 r180 top
RDS4 "FP-RP732A-IPC_A" FP-RP732A-IPC_A 4450,6425 r0 top
RPULL_DOWN1 "RESC1608X55X25ML10T15" RESC1608X55X25ML10T15 3600,1650 r180 bottom
RPULL_DOWN2 "RESC1608X55X25ML10T15" RESC1608X55X25ML10T15 3600,4150 r180 bottom
SCI_B1 "61301021821" 61301021821 1100,4825 r90 top
SCI_C1 "61301021821" 61301021821 1100,2400 r90 top
SW2 "ESWI-EG1218_V" ESWI-EG1218_V 8625,5250 r270 top
SW3 "ESWI-EG1218_V" ESWI-EG1218_V 4425,4025 r180 top
SW4 "ESWI-EG1218_V" ESWI-EG1218_V 4400,2050 r90 top
SW5 "ESWI-EG1218_V" ESWI-EG1218_V 1150,4200 r270 top
SW5$2F$2 "ESWI-EG1218_V" ESWI-EG1218_V 5775,2825 r90 top
SW6 "ESWI-EG1218_V" ESWI-EG1218_V 5875,4975 r180 top
TP_1 "FP-5000-MFG" FP-5000-MFG 6600,4350 r0 top
TP_2 "FP-5000-MFG" FP-5000-MFG 4600,4725 r0 top
TP_3 "FP-5000-MFG" FP-5000-MFG 4800,4025 r0 top
TP_4 "FP-5000-MFG" FP-5000-MFG 4925,3775 r0 top
TP_5 "FP-5000-MFG" FP-5000-MFG 5075,3375 r0 top
TP_-1 "FP-5000-MFG" FP-5000-MFG 6600,5200 r0 top
TP_AGND1 "FP-5001-MFG" FP-5001-MFG 975,5575 r90 top
TP_NONISOGND1 "FP-5001-MFG" FP-5001-MFG 8175,6425 r90 top
TP_PGND1 "FP-5001-MFG" FP-5001-MFG 7200,3875 r90 top
TP_VBAT1 "FP-5000-MFG" FP-5000-MFG 8050,5250 r90 top
U1 "TRACO" TRACO 7725,5175 r270 top
U3 "FP-C04-028C-MFG" FP-C04-028C-MFG 5150,4650 r0 top
U4 "WSON" WSON 3850,1775 r180 top
U5 "FP-C04-028C-MFG" FP-C04-028C-MFG 5150,4050 r0 top
U6 "FP-DRB0008B-MFG" FP-DRB0008B-MFG 5150,3750 r0 top

## Footprints (in the part's own frame and the unit in brackets; to place one, negate y for a bottom-side part, rotate by r counter-clockwise, add the part's x,y. Pads: shape width x height; smd on the part's side, far side on the other; paste and mask are expansions set on the pad)
2-5499206-6 [mm]
  rect 1.5x1.5 hole 0.97: 1(-15.24,-1.27)
  round 1.5 hole 0.97: 2(-15.24,1.27) 3(-12.7,-1.27) 4(-12.7,1.27) 5(-10.16,-1.27) 6(-10.16,1.27) 7(-7.62,-1.27) 8(-7.62,1.27) 9(-5.08,-1.27) 10(-5.08,1.27) 11(-2.54,-1.27) 12(-2.54,1.27) 13(0,-1.27) 14(0,1.27) 15(2.54,-1.27) 16(2.54,1.27) 17(5.08,-1.27) 18(5.08,1.27) 19(7.62,-1.27) 20(7.62,1.27) 21(10.16,-1.27) 22(10.16,1.27) 23(12.7,-1.27) 24(12.7,1.27) 25(15.24,-1.27) 26(15.24,1.27)
  round 4 hole 2.69: 27(-24.13,0) 28(24.13,0)
  silkscreen extent -26.16,-5.16 26.16,4
5.08MM_PITCH_CON2 [mm]
  oval 3.2x3.5 hole 1.2: 1(0,0)
  round 3.2 hole 1.2: 2(5,0)
  silkscreen extent -3.1,-2.8 8.4,3.9
1206 [mm]
  rect 1.4x1.75 smd: 1(-1.6,0) 2(1.6,0)
  silkscreen extent -2.9,-1.4 3,1.4
1812 [mm]
  rect 2.55x4.7 smd: 1(-3.025,0) 2(3.025,0)
  silkscreen extent -1.35,-2.25 1.35,2.25
215760-YY02 [mm]
  rect 1.52x1.52 hole 1.02: 1(0,0)
  round 1.52 hole 1.02: 2(-3,0)
  round 3 hole 3 unplated: 3(-1.5,-4.3)
  silkscreen extent -4.92,-8.96 3.5,0.95
5023860271 [mm]
  rect 0.6x1.7 smd: 1(0.625,-2.225) 2(-0.625,-2.225)
  rect 1x2.7 smd: MP1(2.475,0.975) MP2(-2.475,0.975)
  silkscreen extent -2.88,-3.5 2.88,2.22
61301021821 [mil]
  rect 60x60 hole 40: 1(-200,-50)
  round 60 hole 40: 2(-200,50) 3(-100,-50) 4(-100,50) 5(0,-50) 6(0,50) 7(100,-50) 8(100,50) 9(200,-50) 10(200,50)
  silkscreen extent -265,-103 265,103
BAV99W115 [mm]
  rect 0.6x0.55 smd: 1(-0.65,-0.925) 2(0.65,-0.925) 3(0,0.925)
  silkscreen extent -1,-1.7 1,0.63
C0805 [mm]
  rect 1.1x1.4 smd: 1(-0.75,0) 2(0.75,0)
  silkscreen extent -1.52,-0.89 1.52,0.89
CAPC1608X92X38ML15T08 [mm]
  rect 0.95x1.1 smd: 1(-0.725,0) 2(0.725,0)
  silkscreen extent -1.52,-0.89 1.52,0.89
CAPPR80-750-2000X1800X2200 [mm]
  rect 1.55x1.55 hole 1.05: 1(-3.75,0)
  round 1.55 hole 1.05: 2(3.75,0)
  silkscreen extent -10.66,-9 9,9
CONV_PQAE50-D24-S24-D [mm]
  rect 2.25x2.25 / inner round 2.25 / far side rect 2.25x2.25 hole 1.5: 1(-22.86,7.62)
  round 2.25 hole 1.5: 2(-22.86,-2.54) 3(-22.86,-7.62) 4(22.86,-10.16) 5(22.86,0) 6(22.86,10.16)
  silkscreen extent -26.1,-12.7 25.4,12.7
D0014A_L [mm]
  rrect18% 1.25x0.55 smd: 1(-2.625,3.81) 2(-2.625,2.54) 3(-2.625,1.27) 4(-2.625,0) 5(-2.625,-1.27) 6(-2.625,-2.54) 7(-2.625,-3.81) 8(2.625,-3.81) 9(2.625,-2.54) 10(2.625,-1.27) 11(2.625,0) 12(2.625,1.27) 13(2.625,2.54) 14(2.625,3.81)
  silkscreen extent -2.75,-4.38 1.6,4.76
DIOC3225X06N [mm]
  rect 1.5x2.65 smd: 1(-1.275,0) 2(1.275,0)
  silkscreen extent -2.29,-1.22 0.15,1.59
DIODE [mm]
  rect 2.15x1.85 smd: 1(-2.175,0) 2(2.175,0)
  silkscreen extent -0.7,-0.82 0.7,0.82
ESWI-EG1218_V [mm]
  rect 1.5x1.5 hole 1: 1(-2.5,0)
  round 1.5 hole 1: 2(0,0) 3(2.5,0)
  silkscreen extent -5.8,-2 5.8,2.78
FP-178_6164_0001-MFG [mm]
  rect 3.05x3.05 hole 2: 1(-4.6,-1.2)
  round 3.05 hole 2: 2(4.6,-1.2)
  round 2.4 hole 2.4 unplated: $$$1(0,0)
  silkscreen extent -10.1,-3.05 10.1,3.05
FP-0466-MFG [mil]
  rect 45x80 smd: 1(-52.5,0) 2(52.5,0)
  silkscreen extent -15,-32 15,32
FP-751B-05-MFG [mm]
  rect 1.12x0.58 smd: 1(-2.64,4.445) 2(-2.64,3.175) 3(-2.64,1.905) 4(-2.64,0.635) 5(-2.64,-0.635) 6(-2.64,-1.905) 7(-2.64,-3.175) 8(-2.64,-4.445) 9(2.64,-4.445) 10(2.64,-3.175) 11(2.64,-1.905) 12(2.64,-0.635) 13(2.64,0.635) 14(2.64,1.905) 15(2.64,3.175) 16(2.64,4.445)
  silkscreen extent -3.88,-5 1.63,5
FP-5000-MFG [mm]
  round 1.57 hole 1.02: 1(0,0)
  silkscreen extent -1.35,-1.34 1.35,1.34
FP-5001-MFG [mm]
  round 1.57 hole 1.016: 1(0,0)
  silkscreen extent -1.34,-1.35 1.34,1.35
FP-ACT45B-MFG [mm]
  rect 1.35x0.9 smd: 1(-2.275,1.25) 2(-2.275,-1.25) 3(2.275,-1.25) 4(2.275,1.25)
  silkscreen extent -3.62,-1.7 2.35,1.7
FP-C04-028C-MFG [mm]
  rect 1.1x0.6 smd: 1(-1.4,0.95) 2(-1.4,0) 3(-1.4,-0.95) 4(1.4,-0.95) 5(1.4,0) 6(1.4,0.95)
  silkscreen extent -2.8,-1.53 0.48,1.53
FP-CC0603-0_9-MFG [mm]
  rect 0.8x0.9 smd: 1(-0.75,0) 2(0.75,0)
  silkscreen extent -0.85,-0.85 0.85,0.85
FP-CC0603-DA-MFG [mm]
  rect 0.8x0.9 smd: 1(-0.75,0) 2(0.75,0)
  silkscreen extent -0.85,-0.85 0.85,0.85
FP-CGA3E-0_3-0_1-IPC_A [mm]
  rect 0.956x1.206 smd: 1(-1.025,0) 2(1.025,0)
  silkscreen extent -0.25,-0.6 0.25,0.6
FP-D0014A-MFG [mm]
  rect 1.55x0.6 smd paste+6.05: 1(-2.7,3.81) 2(-2.7,2.54) 3(-2.7,1.27) 4(-2.7,0) 5(-2.7,-1.27) 6(-2.7,-2.54) 7(-2.7,-3.81) 8(2.7,-3.81) 9(2.7,-2.54) 10(2.7,-1.27) 11(2.7,0) 12(2.7,1.27) 13(2.7,2.54) 14(2.7,3.81)
  silkscreen extent -4.15,-4.38 1.55,4.38
FP-DRB0008B-MFG [mm]
  rrect33% 0.6x0.3 smd: 1(-1.4,0.975) 2(-1.4,0.325) 3(-1.4,-0.325) 4(-1.4,-0.975) 5(1.4,-0.975) 6(1.4,-0.325) 7(1.4,0.325) 8(1.4,0.975)
  rrect6% 1.65x2.4 smd paste+5.525: 9(0,0)
  silkscreen extent -2.37,-1.55 1.55,1.55
FP-ERA3A-IPC_A [mil]
  rect 49.41x43.55 smd: 1(-32.51,0) 2(32.51,0)
  silkscreen extent -57,-38 57,38
FP-ERJ-3GEY0R00V-MFG [mm]
  rect 0.65x0.9 smd: 1(-0.725,0) 2(0.725,0)
  silkscreen extent -1.03,-0.87 1.03,0.87
FP-FBMH3225-MFG [mm]
  rect 1.4x2.9 smd: 1(-1.8,0) 2(1.8,0)
  silkscreen extent -0.72,-1.4 0.72,1.4
FP-GRM188-0_1-E0_2_0_55-IPC_A [mil]
  rect 47.57x39.85 smd: 1(-31.57,0) 2(31.57,0)
  silkscreen extent -55,-36 55,36
FP-RC0603-0_55-IPC_A [mil]
  rect 41.68x39.85 smd: 1(-34.52,0) 2(34.52,0)
  silkscreen extent -55,-36 55,36
FP-RN732A-MFG [mm]
  rect 1x1.35 smd: 1(-1,0) 2(1,0)
  silkscreen extent -0.13,-0.7 0.13,0.7
FP-RP732A-IPC_A [mil]
  rect 51.42x59.38 smd: 1(-38.43,0) 2(38.43,0)
  silkscreen extent -64,-45 64,45
FP-SMA-MFG [mm]
  rect 2.5x1.7 smd: 1(-2,0) 2(2,0)
  silkscreen extent -3.92,-1.46 2.3,1.46
FP-SOD323-MFG [mm]
  rect 0.59x0.45 smd: 1(-1.055,0) 2(1.055,0)
  silkscreen extent -2.13,-0.7 0.9,0.7
INDUCTOR [mm]
  rect 1.8x3.5 smd: 1(-1.35,0) 2(1.35,0)
  silkscreen extent -2.8,-2.3 2.7,2.3
KSTN-5012_V [mm]
  round 2.1 hole 1.6: 1(0,0)
  silkscreen extent -1.59,-1.58 1.59,1.58
MSS6132223MLC [mm]
  rect 6x2 smd: 1(0,2) 2(0,-2)
  silkscreen extent -3.05,-0.6 3.05,0.6
MT140 [mil]
  round 120 hole 120 unplated: 1(0,0)
PCBCOMPONENT_1 [mil]
  round 80 / inner round 60 / far side round 80 hole 48: 1(-82.68,-3.11)
  round 80 hole 48: 2(82.68,-3.11)
  round 60 hole 135.04: 3(-353.35,-253.08) 3/2(0,233.11) 5(354.72,-253.11)
  silkscreen extent -420,-318 -290,-188
PCBCOMPONENT_1$2F$2 [mil]
  rrect0% 74x74 hole 40: 1(-3400,-100) 20(-3400,1700) 21(-3400,0) 40(-3400,1600) 41(-900,-100) 60(-900,1700) 61(-900,0) 80(-900,1600)
  round 74 hole 40: 2(-3300,-100) 3(-3200,-100) 4(-3100,-100) 5(-3000,-100) 6(-2900,-100) 7(-2800,-100) 8(-2700,-100) 9(-2600,-100) 10(-2500,-100) 11(-2500,1700) 12(-2600,1700) 13(-2700,1700) 14(-2800,1700) 15(-2900,1700) 16(-3000,1700) 17(-3100,1700) 18(-3200,1700) 19(-3300,1700) 22(-3300,0) 23(-3200,0) 24(-3100,0) 25(-3000,0) 26(-2900,0) 27(-2800,0) 28(-2700,0) 29(-2600,0) 30(-2500,0) 31(-2500,1600) 32(-2600,1600) 33(-2700,1600) 34(-2800,1600) 35(-2900,1600) 36(-3000,1600) 37(-3100,1600) 38(-3200,1600) 39(-3300,1600) 42(-800,-100) 43(-700,-100) 44(-600,-100) 45(-500,-100) 46(-400,-100) 47(-300,-100) 48(-200,-100) 49(-100,-100) 50(0,-100) 51(0,1700) 52(-100,1700) 53(-200,1700) 54(-300,1700) 55(-400,1700) 56(-500,1700) 57(-600,1700) 58(-700,1700) 59(-800,1700) 62(-800,0) 63(-700,0) 64(-600,0) 65(-500,0) 66(-400,0) 67(-300,0) 68(-200,0) 69(-100,0) 70(0,0) 71(0,1600) 72(-100,1600) 73(-200,1600) 74(-300,1600) 75(-400,1600) 76(-500,1600) 77(-600,1600) 78(-700,1600) 79(-800,1600)
  round 125 hole 125 unplated: $$$1(350,1850) $$$2(-4550,1850) $$$3(350,-250) $$$4(-4550,-250)
  silkscreen extent -4650,-350 460,1950
PW0020A_N [mm]
  rrect22% 1.4x0.45 smd: 1(-2.95,2.925) 2(-2.95,2.275) 3(-2.95,1.625) 4(-2.95,0.975) 5(-2.95,0.325) 6(-2.95,-0.325) 7(-2.95,-0.975) 8(-2.95,-1.625) 9(-2.95,-2.275) 10(-2.95,-2.925) 11(2.95,-2.925) 12(2.95,-2.275) 13(2.95,-1.625) 14(2.95,-0.975) 15(2.95,-0.325) 16(2.95,0.325) 17(2.95,0.975) 18(2.95,1.625) 19(2.95,2.275) 20(2.95,2.925)
  silkscreen extent -3.08,-3.3 1.85,3.82
RESC1608X55X25ML10T15 [mm]
  rect 0.8x1 smd: 1(-0.75,0) 2(0.75,0)
RESC1608X55X30LL15T15 [mm]
  rect 0.7x0.85 smd: 1(-0.625,0) 2(0.625,0)
RESC1608X55X30NL15T15 [mm]
  rrect0% 0.95x0.95 smd: 1(-0.75,0) 2(0.75,0)
  silkscreen extent -0.38,-0.76 0.38,0.76
RESC1608X55X30NL15T15$2F$2 [mm]
  rect 0.8x0.95 smd: 1(-0.675,0) 2(0.675,0)
  silkscreen extent -0.38,-0.76 0.38,0.76
RESC1609X50X30LL10T20 [mm]
  rect 0.7x0.85 smd: 1(-0.575,0) 2(0.575,0)
  silkscreen extent -1.14,-0.64 1.14,0.64
RESC1609X50X30ML10T20 [mm]
  rect 0.9x1.05 smd: 1(-0.675,0) 2(0.675,0)
RESC1609X55X30LL15T15 [mm]
  rect 0.75x0.85 smd: 1(-0.65,0) 2(0.65,0)
  silkscreen extent -1.27,-0.64 1.27,0.64
RHDR2W80P0X254_1X2_558X254X850P [mm]
  rect 2.025x2.025 hole 1.35: 1(0,0)
  round 2.025 hole 1.35: 2(2.54,0)
  silkscreen extent -1.52,-1.27 4.41,1.46
SOIC127P600X175-14N [mm]
  rect 1.525x0.7 smd: 1(-2.712,3.81) 2(-2.712,2.54) 3(-2.712,1.27) 4(-2.712,0) 5(-2.712,-1.27) 6(-2.712,-2.54) 7(-2.712,-3.81) 8(2.712,-3.81) 9(2.712,-2.54) 10(2.712,-1.27) 11(2.712,0) 12(2.712,1.27) 13(2.712,2.54) 14(2.712,3.81)
  silkscreen extent -1.6,-4.33 1.6,4.33
SOIC127P700X210-4N [mm]
  rect 1.65x0.65 smd: 1(-3.2,0.635) 2(-3.2,-0.635) 3(3.2,-0.635) 4(3.2,0.635)
  silkscreen extent -4.03,-1.35 2.02,1.35
TECO-5-146280-2_V [mm]
  rect 1.4x1.4 hole 0.89: 1(-1.27,0)
  round 1.4 hole 0.89: 2(1.27,0)
  silkscreen extent -2.41,-1.17 2.41,1.94
TRACO [mm]
  round 3.5 hole 1.2: 1(12.6,-0.1) 2(7.6,0) 3(0,0) 4(20.2,-20.2) 5(10.1,-20.2) 6(0,-20.3)
  silkscreen extent -3.5,-25.2 23.9,4.4
WE-CMB-M [mm]
  round 1.6 hole 1: 1(-3.75,-5.35) 2(-3.75,5.35) 3(3.75,5.35) 4(3.75,-5.35)
  silkscreen extent -12.5,-8.5 12.5,8.5
WSON [mm]
  rect 0.65x0.3 smd mask+0.01: 1(-0.7,0.5) 2(-0.7,0) 3(-0.7,-0.5) 4(0.7,-0.5) 5(0.7,0) 6(0.7,0.5)
  silkscreen extent -1.25,-0.95 0.8,1

## Via types
v1: diameter 32, hole 16, Top to Bottom, 259 vias
v2: diameter 40, hole 20, Top to Bottom, 12 vias
v3: diameter 19.68, hole 7.87, Top to Bottom, 4 vias

## Nets (pads, with @x,y where several pads share a name; then routed paths per layer and width w, separated by ;. In a path a pad name is that pad's centre, name@x,y a point inside that pad or via, vN(x,y) a via of type N, cw(c..) or ccw(c..) an arc to the next point about the centre after c; other vN are vias at no path point)
3V3: 9.2 13.1 C20.1 C27.1 J_SUPPLY1.9 J_SUPPLY1.10 L8.1 P4.1 P13.1 P14.1 P17.2 RDS1.2 SW4.1 SW6.3 TP_2.1 U4.1 U4.2 | length 12570.4
  Top w10: U4.1@3877.56,1755.31 3912.99,1755.31 3912.99,1770 3907.99,1775 U4.2@3877.56,1775
  Top w25: 3912.99,1625 3912.99,1755.31
  Top w40: v1(3875,1625) 3912.99,1625 ; C27.1@4912.99,4875 4912.99,4787.01 v1(4925,4775) ; C20.1@4912.99,5000 v1(4950,5000) ; v1(4990,4950) L8.1@5046.26,4950 5050,4953.74 5050,5100 5075,5125 5500,5125 5650,4975 SW6.3@5776.57,4975 ; v1(6060,4350) 6060,4301.57 RDS1.2@6061.57,4300
  POWER PLANE w40: P14.1@700,1225 700,1400 775,1475 3825,1475 3875,1525 v1(3875,1625) 4350,1625 4400,1675 SW4.1@4400,1951.57 4323.43,1951.57 4300,1975 4300,2700 ; P4.1@4100,2850 4250,2850 4300,2800 4300,2700 ; P13.1@4600,4875 TP_2.1@4600,4725 ; v1(4925,4685) 4925,4725 ; v1(4950,5000) 4950,4950 ; v1(4990,4950) 4950,4950 ; P17.2@5325,3375 5625,3375 5675,3425 5675,4400 ; SW6.3@5776.57,4975 5700,4975 5675,4950 5675,4400 ; J_SUPPLY1.10@5875,4350 J_SUPPLY1.9@5775,4350 5725,4350 5675,4400 ; 4300,2700 4300,3150 4400,3250 4400,3725 4600,3925 TP_2.1@4600,4725 ; TP_2.1@4600,4725 4925,4725 ; 4925,4725 v1(4925,4775) 4925,4925 4950,4950
  Bottom w40: 9.2@4881.57,5000 v1(4950,5000) ; 13.1@4923.43,4615 4923.43,4683.43 v1(4925,4685) ; v1(4990,4950) 5083.46,4950 ; J_SUPPLY1.10@5875,4350 v1(6060,4350)
3V3_C: IC2.4 IC5.4 J_SPI_A1.10 J_SPI_B1.10 LUANCH_PAD1.1 LUANCH_PAD1.41 R_UP1.2 R_UP2.2 R_UP3.2 R_UP4.2 R_UP5.2 R_UP6.2 R_UP7.2 R_UP8.2 R_UP9.2 R_UP10.2 R_UP11.2 R_UP12.2 SCI_B1.7 SCI_B1.8 SCI_C1.7 SCI_C1.8 SW4.2 SW4.3 | length 17152.3
  Top w25: IC5.4@8349.02,3600 8400,3600 8410,3610 8410,3810 ; IC2.4@8349.02,3825 8395,3825 8410,3810 ; v1(8420,3955) 8410,3945 8410,3810
  Top w40: SCI_C1.7@1150,2500 1225,2500 1250,2525 1250,2925 1050,3125 1050,4375 1225,4550 1225,4900 1200,4925 SCI_B1.7@1150,4925 ; v1(4114.37,4480) 4114.37,3095 4115,3094.37 ; v1(4115,3905) 4115,3094.37 ; v1(4155,4750) v1(4155,4850) ; v1(4164.37,2200) 4164.37,2394.37 v1(4165,2395) 4165,2675 4195,2705 4195,3014.37 4115,3094.37
  Bottom w25: v1(4115,3905) 6050,3905 6100,3955 v1(8420,3955)
  Bottom w40: SCI_C1.8@1050,2500 SCI_C1.7@1150,2500 1390,2500 1440,2550 LUANCH_PAD1.41@1600,2550 1600,2650 1650,2700 3345,2700 3405,2640 4114.37,2640 4164.37,2590 R_UP8.2@4164.37,2450 ; SCI_B1.8@1050,4925 SCI_B1.7@1150,4925 1285,4925 1410,5050 LUANCH_PAD1.1@1600,5050 ; J_SPI_A1.10@3875,4550 3875,4495 3890,4480 v1(4114.37,4480) R_UP6.2@4114.37,4550 R_UP2.2@4114.37,4650 ; J_SPI_B1.10@3950,2050 3950,2000 3980,1970 4135,1970 4165,2000 4165,2049.37 R_UP1.2@4164.37,2050 R_UP5.2@4164.37,2150 ; R_UP12.2@4114.37,4850 v1(4155,4850) ; v1(4155,4750) R_UP11.2@4114.37,4750 R_UP2.2@4114.37,4650 ; R_UP10.2@4164.37,2250 v1(4164.37,2200) R_UP5.2@4164.37,2150 ; R_UP9.2@4164.37,2350 v1@4164.37,2395 ; v1(4165,2395) v1@4164.37,2395 ; R_UP3.2@4339.37,4850 R_UP7.2@4339.37,4750 4339.37,4670 4319.37,4650 R_UP2.2@4114.37,4650 ; R_UP4.2@4389.37,2350 4389.37,2405 4344.37,2450 R_UP8.2@4164.37,2450 ; SW4.2@4400,2050 SW4.3@4400,2148.43 4398.43,2150 R_UP5.2@4164.37,2150 ; v1@4164.37,2395 R_UP8.2@4164.37,2450
3V3_L: BUFF_1.4 C18.1 C21.1 C22.2 C48.2 C58.2 FILTER_2.4 P4.2 | length 3699.2
  Top w25: v1(2350,4110) v1(2350,3900) v1(2350,3620) v1(2350,3150) 2350,2975 2355,2970 v1(2355,2945)
  Bottom w25: v1(2350,3150) BUFF_1.4@2440,3150 ; v1(2350,3620) 2350,3651.46 C58.2@2353.54,3655 ; v1(2350,3900) FILTER_2.4@2431.3,3900 2647.01,3900 2662.01,3885 C21.1@2662.01,3850 ; v1(2350,4110) 2350,4146.46 C22.2@2353.54,4150 ; C48.2@2353.54,2900 2353.54,2943.54 v1(2355,2945) ; BUFF_1.4@2431.3,3150 BUFF_1.4@2440,3150 ; C18.1@2662.01,3075 2660,3077.01 2660,3125 2635,3150 BUFF_1.4@2440,3150
  Bottom w40: C48.2@2353.54,2900 2465,2900 2525,2840 3700,2840 3710,2850 P4.2@4000,2850
3V3_L1: BUFF_2.4 C19.1 C23.1 C24.2 C47.2 C57.2 FILTER_1.4 P13.2 | length 3352.4
  Bottom w25: BUFF_2.4@2131.3,5575 2225,5575 2275,5525 C19.1@2412.01,5525 ; FILTER_1.4@3006.3,5575 3105,5575 3125,5555 3125,5450 3145,5430 3207.01,5430 C23.1@3212.01,5425
  Bottom w40: C19.1@2412.01,5525 2412.01,5455 2421.46,5455 ; C24.2@2421.46,5325 C47.2@2421.46,5400 2421.46,5455 ; C23.1@3212.01,5425 3212.01,5354.45 3221.46,5345 C57.2@3221.46,5300 ; P13.2@4500,4875 4500,4925 4475,4950 4100,4950 3825,5225 3236.46,5225 3221.46,5240 C57.2@3221.46,5300 ; 2421.46,5455 2630,5455 2735,5350 3080,5350 3130,5300 C57.2@3221.46,5300
5V: 8.1 C26.1 P16.1 SW3.1 TP_3.1 | length 978.3
  Top w40: SW3.1@4523.43,4025 4600,4025 ; P16.1@4650,3775 4650,4000 4625,4025 4600,4025 ; C26.1@4912.99,4275 4912.99,4200 4800,4087.01 TP_3.1@4800,4025 4600,4025
  Bottom w20: TP_3.1@4800,4025 4810,4015 8.1@4915.39,4015
5V_C: C28.2 C29.2 C30.2 C31.2 C34.2 C35.2 C36.2 C37.2 DBUFF_1.20 DBUFF_2.20 LS_A1.1 LS_B1.1 LUANCH_PAD1.21 LUANCH_PAD1.61 SW3.2 SW3.3 SW5.1 | length 9565.7
  Top w40: v1(1450,4300) 1450,4095 1490,4055 1755,4055 ; LUANCH_PAD1.61@1700,2550 1700,2985 1650,3035 1650,3950 1755,4055 ; LUANCH_PAD1.21@1700,5050 1775,5050 1800,5025 v1(1800,4275) 1800,4100 1755,4055 ; v1(2421.46,5210) 2421.46,5156.46 2465,5112.91 v1(2465,5050) ; v1(2725,5085) v1(2725,5175)
  Bottom w15: v1(2725,5085) 2744.84,5065.16 DBUFF_1.20@2783.86,5065.16
  Bottom w20: C28.2@2770,5173.54 C28.2@2771.46,5175 ; C30.2@2821.46,2480 2821.46,2412.4 2833.86,2400 DBUFF_2.20@2833.86,2365.16
  Bottom w25: LUANCH_PAD1.21@1700,5050 2045,5050 2090,5095 2430,5095 ; C36.2@2421.46,2475 2420,2473.54 2420,2423.94 ; LS_B1.1@2428.94,2375 2428.94,2415 2420,2423.94 ; LS_A1.1@2428.94,5050 LS_A1.1@2430,5050 ; v1(2465,5050) LS_A1.1@2430,5050 ; v1(2725,5085) 2715,5095 2430,5095 ; C30.2@2821.46,2475 2710,2475 2660,2425 2421.06,2425 2420,2423.94 ; LS_A1.1@2430,5050 2430,5095
  Bottom w40: SW5.1@1150,4298.43 1448.43,4298.43 v1(1450,4300) ; LUANCH_PAD1.61@1700,2550 1903.54,2550 1975,2621.46 2400,2621.46 2421.46,2600 C37.2@2421.46,2550 C36.2@2421.46,2475 ; v1(1800,4275) 3125,4275 3175,4225 3175,4100 3250,4025 SW3.3@4326.57,4025 SW3.2@4425,4025 ; C34.2@2421.46,5175 v1(2421.46,5210) C35.2@2421.46,5250 ; v1(2725,5175) 2768.54,5175 C28.2@2770,5173.54 ; C28.2@2771.46,5175 C29.2@2771.46,5250 ; C30.2@2821.46,2475 2821.46,2480 C31.2@2821.46,2550
15V: 7.2 12.2 C32.2 C33.2 C38.2 C39.2 C52.1 C55.1 C59.2 LS_A1.16 LS_B1.16 P3.1 P7.2 P12.1 RDS3.2 TP_1.1 U1.4 U3.4 U3.5 U5.4 U5.5 | length 15554.4
  Top w15: U3.4@5205.12,4612.6 5255,4612.6 5255,4630 5255,4650 U3.5@5205.12,4650
  Top w20: U5.4@5205.12,4012.6 5260,4012.6 5260,4025 ; U5.5@5205.12,4050 5260,4050 5260,4025 ; 7.2@5418.43,4025 v1(5370,4025) 5260,4025
  Top w40: 5255,4630 5260,4635 v1(5370,4635) 12.2@5418.43,4635 ; v1(6550,3875) RDS3.2@6636.57,3875
  POWER PLANE w25: v1(2175,5050) v1(2175,5175)
  POWER PLANE w40: P12.1@1075,5300 1075,5350 1100,5375 1250,5375 ; 2000,2475 v1(2125,2475) ; v1(2175,5175) v1(2175,5250) 2025,5250 1900,5375 1250,5375 ; v1(5370,4025) v1(5370,4635) 5370,5080 5325,5125 ; v1(6550,3875) 6575,3875 ; 6575,1925 6575,2000 6550,2025 6350,2025 6325,2050 6325,2725 6350,2750 6550,2750 6575,2775 P3.1@6575,3075 6575,3875 ; v1(6750,4455) 6750,4379.72 ; U1.4@6929.72,4379.72 6750,4379.72 ; 1250,5375 1250,6275 1350,6375 3150,6375 3650,5875 3650,5225 3750,5125 5325,5125 ; 5325,5125 6425,5125 6475,5075 6475,4700 6600,4575 v1(6600,4455) TP_1.1@6600,4350 ; 6575,3875 6575,4000 6600,4025 TP_1.1@6600,4350 ; TP_1.1@6600,4350 6600,4379.72 6750,4379.72
  Bottom w25: v1(2175,5050) LS_A1.16@2221.06,5050 ; C32.2@2196.46,2475 2196.46,2425 2221.46,2400 2221.46,2375.39 LS_B1.16@2221.06,2375
  Bottom w40: v1(2125,2475) C32.2@2196.46,2475 C33.2@2196.46,2550 ; v1(2175,5175) C38.2@2221.46,5175 ; v1(2175,5250) C39.2@2221.46,5250 ; v1(6600,4455) C52.1@6600,4512.01 ; v1(6750,4455) C55.1@6750,4512.01 ; U1.4@6929.72,4379.72 7185.63,4379.72 7230.91,4425 C59.2@7230.91,4600
15V_OUT: J2.16 J2.17 | length 141.4
  Top w40: J2.16@5025,450 J2.17@5125,350
24V: COUT_1.1 COUT_2.1 CY1.2 J_SUPPLY1.1 PS1.4 RDS4.2 | length 4150.7
  Top w40: PS1.4@4075,6125 4438.43,6125 4488.43,6175 RDS4.2@4488.43,6425 CY1.2@5005.91,6425
  Bottom w80: PS1.4@4075,6125 COUT_2.1@4075,5987.99 COUT_1.1@4225,5987.99 4315,5987.99 4350,5952.99 4350,5205 4355,5205 4410,5150 5570,5150 5635,5085 5635,4810 5695,4750 J_SUPPLY1.1@5775,4750
24V_IPM: J2.14 J2.15 | length 3232.8
  Top w40: v1(5775,620) 5775,2726.57
  Bottom w40: J2.15@5025,350 J2.14@4925,450 4925,560 4985,620 v1(5775,620)
$$$1: P14.2 R64.2 R65.2 R66.2 | length 1327.6
  Top w40: v1(485,2090) R64.2@485,2032.51 R66.2@600,2032.51 R65.2@700,2032.51 ; P14.2@600,1225 v2(600,1367.49)
  Bottom w40: v1(485,2090) 485,1570 600,1455 P14.2@600,1225
$$$2: IC4.11 P8.1 | length 418.2
  Top w20: IC4.11@650,1831.77 v1(650,1900)
  POWER PLANE w40: v1(650,1900) P8.1@650,2250
$$$3: IC4.4 P7.1 | length 820
  Top w20: v1(650,1550) IC4.4@650,1618.23
  POWER PLANE w40: v1(650,1550) 650,1775 775,1900 P7.1@775,2250
+15_L: BUFF_4.4 C14.1 C16.2 C65.2 P3.2 | length 3285.4
  Top w25: v1(3675,3125) v1(3675,3250)
  Bottom w25: BUFF_4.4@3553.35,3125 v1(3675,3125) C16.2@3721.46,3125 C65.2@3721.46,3050 ; v1(3675,3250) C14.1@3737.01,3250
  Bottom w40: C65.2@3721.46,3050 3721.46,3000 3746.46,2975 3750,2975 4100,2975 4200,3075 P3.2@6475,3075
+15_L1: BUFF_3.4 C15.1 C17.2 C64.2 P12.2 | length 1117.3
  Bottom w25: C15.1@1587.99,5300 1587.99,5362.01 1550,5400 1550,5550 1575,5575 BUFF_3.4@1628.35,5575
  Bottom w40: P12.2@1175,5300 1250,5300 1325,5225 1562.99,5225 1587.99,5250 C15.1@1587.99,5300 C17.2@1746.46,5300 C64.2@1746.46,5200
-15_L: BUFF_4.11 C62.2 C63.2 P2.2 | length 2256
  Top w40: P2.2@3150,1100 3150,2800 3250,2900 v1(3250,3050)
  Bottom w25: C63.2@3203.54,3125 BUFF_4.11@3346.65,3125
  Bottom w40: C63.2@3203.54,3125 C62.2@3203.54,3050 v1(3250,3050)
-15_L1: BUFF_3.11 C60.2 C61.2 P11.2 | length 457
  Bottom w25: C61.2@1253.54,5575 BUFF_3.11@1421.65,5575
  Bottom w40: P11.2@1175,5800 1228.54,5800 1253.54,5775 C60.2@1253.54,5675 C61.2@1253.54,5575
-15V: C53.1 C54.1 C56.2 P2.1 P8.2 P9.1 P11.1 TP_-1.1 U1.6 | length 13710.1
  POWER PLANE w40: P8.2@650,2350 650,2575 800,2725 800,4350 750,4400 750,5650 900,5800 P11.1@1075,5800 ; P2.1@3250,1100 4800,1100 5000,900 6940,900 7090,1050 7090,2125 ; P9.1@6575,2125 7090,2125 ; TP_-1.1@6600,5200 6825,5200 6850,5175 U1.6@6925.79,5175 7120,5175 7205,5090 7205,4130 7090,4015 7090,2125
  Bottom w40: C53.1@6600,5037.99 v1(6600,5105) ; C54.1@6750,5037.99 v1(6750,5100) ; U1.6@6925.79,5175 7175.91,5175 7230.91,5120 C56.2@7230.91,4875
ADCINA3/ANALOGIN: C43.2 FILTER_2.13 FILTER_2.14 LUANCH_PAD1.26 | length 1102.3
  Top w12: v1(1900,4550) 1900,4235 1935,4200 v1(1935,4125)
  Bottom w12: LUANCH_PAD1.26@1700,4550 v1(1900,4550) ; v1(1935,4125) C43.2@1987.99,4125 2125,4125 2150,4100 2150,4050 ; FILTER_2.13@2218.7,4000 2150,4000 2150,4050 ; FILTER_2.14@2218.7,4050 2150,4050
ADCINB2/ANALOGIN: C44.2 FILTER_1.1 FILTER_1.2 LUANCH_PAD1.28 | length 3083.6
  Top w12: v1(2965,4350) 2965,4865 3075,4975 3075,5175 3075,5670 v1(3070,5675)
  Bottom w12: LUANCH_PAD1.28@1700,4350 v1(2965,4350) ; v1(3070,5675) FILTER_1.2@3006.3,5675 FILTER_1.1@3006.3,5725 3095,5725 3115,5745 3115,5855 3135,5875 C44.2@3212.01,5875
ADCINB3/ANALOGIN: C42.2 FILTER_2.8 FILTER_2.9 LUANCH_PAD1.25 | length 1646.9
  Top w12: v1(1950,4650) 1950,4300 2050,4200 v1(2050,3675)
  Bottom w12: LUANCH_PAD1.25@1700,4650 v1(1950,4650) ; C42.2@1987.99,3675 v1(2050,3675) 2125,3750 2150,3750 ; FILTER_2.8@2218.7,3750 2150,3750 ; FILTER_2.9@2218.7,3800 2150,3800 2150,3750
ADCINC2/ANALOGIN: C45.2 FILTER_2.1 FILTER_2.2 LUANCH_PAD1.27 | length 1414.6
  Top w12: v1(2425,4150) v1(2425,4450)
  Bottom w12: LUANCH_PAD1.27@1700,4450 v1(2425,4450) ; FILTER_2.2@2431.3,4000 FILTER_2.1@2431.3,4050 2431.3,4094.4 2425,4100.7 v1(2425,4150) C45.2@2662.01,4150
ADCINC3/ANALOGIN: C46.2 FILTER_2.6 FILTER_2.7 LUANCH_PAD1.24 | length 2167.6
  Top w12: v1(2500,3800) v1(2500,4550)
  Bottom w12: LUANCH_PAD1.24@1700,4750 1950,4750 2150,4550 v1(2500,4550) ; FILTER_2.7@2431.3,3750 2500,3750 ; FILTER_2.6@2431.3,3800 v1(2500,3800) 2500,3750 ; C46.2@2662.01,3550 2525,3550 2500,3575 2500,3750
AGND: BUFF_1.11 BUFF_2.11 C5.2 C6.2 C14.2 C15.2 C16.1 C17.1 C18.2 C19.2 C21.2 C22.1 C23.2 C24.1 C40.2 C41.2 C47.1 C48.1 C49.2 C50.2 C51.2 C57.1 C58.1 C60.1 C61.1 C62.1 C63.1 C64.1 C65.1 FB1.1 FILTER_1.11 FILTER_2.11 R5.1 R10.1 R15.1 R20.1 R25.1 R28.1 R39.1 R42.1 R55.2 TP_AGND1.1 | length 2266.5
  Top w40: v1(4275,3650) FB1.1@4329.13,3650
  Bottom w20: FILTER_2.11@2218.7,3900 v1(2275,3900) ; R5.1@2878.54,3200 2878.54,3151.46 v1(2880,3150)
  Bottom w25: v1(1735,3100) R15.1@1771.46,3100 ; v1(1735,3200) R20.1@1771.46,3200 ; v1(1840,5575) BUFF_2.11@1918.7,5575 ; BUFF_1.11@2218.7,3150 v1(2280,3150) ; v1(2720,5575) FILTER_1.11@2793.7,5575 ; R10.1@2878.54,2950 2878.54,2998.54 v1(2880,3000)
  Bottom w40: v1(1145,5575) C61.1@1196.46,5575 ; v1(1145,5675) C60.1@1196.46,5675 ; v1(1400,5300) C15.2@1462.01,5300 ; v1(1500,3675) C41.2@1562.01,3675 ; v1(1500,3825) C40.2@1562.01,3825 ; C64.1@1803.54,5200 v1(1855,5200) ; C17.1@1803.54,5300 v1(1855,5300) ; v1(2245,2900) C48.1@2296.46,2900 ; v1(2245,3655) C58.1@2296.46,3655 ; v1(2250,4150) C22.1@2296.46,4150 ; C24.1@2478.54,5325 v1(2525,5325) ; C47.1@2478.54,5400 v1(2525,5400) ; C19.2@2537.99,5525 v1(2595,5525) ; 2537.99,5875 v1(2625,5875) ; v1(2735,3075) C18.2@2787.99,3075 ; v1(2745,3850) C21.2@2787.99,3850 ; C50.2@3087.99,3700 v1(3145,3700) ; C51.2@3087.99,4000 v1(3145,4000) ; v1(3100,3050) C62.1@3146.46,3050 ; v1(3100,3125) C63.1@3146.46,3125 ; C57.1@3278.54,5300 v1(3320,5300) ; C23.2@3337.99,5425 v1(3390,5425) ; C49.2@3337.99,5575 v1(3390,5575) ; C65.1@3778.54,3050 v1(3825,3050) ; C16.1@3778.54,3125 v1(3825,3125) ; C14.2@3862.99,3250 v1(3930,3250) ; v1(5240,2065) 5240.47,2065.47 C6.2@5240.47,2130 ; R25.1@5250,1724.41 v1@5300,1724.41 ; R28.1@5250,2300.59 v1@5300,2300.59 ; v1(5300,1725) v1@5300,1724.41 ; v1(5300,2300) v1@5300,2300.59 ; R39.1@5350,1724.41 v1@5300,1724.41 ; R42.1@5350,2300.59 v1@5300,2300.59 ; C5.2@5354.53,1925 5354.53,1984.53 v1(5355,1985) ; R55.2@6095,1724.41 6149.41,1724.41 v1(6150,1725)
B_1A_O: BUFF_4.1 BUFF_4.2 R1.1 | length 697.5
  Top w12: v1(3195,3200) v1(3195,3325)
  Bottom w12: R1.1@3051.57,3200 v1(3195,3200) ; v1(3195,3325) 3400,3325 3450,3275 BUFF_4.1@3553.35,3275 BUFF_4.2@3553.35,3225
B_1B_O: BUFF_4.6 BUFF_4.7 R6.1 | length 630.3
  Bottom w12: R6.1@3051.57,2950 3175,2950 3200,2925 3425,2925 3475,2975 3500,2975 ; BUFF_4.7@3553.35,2975 3500,2975 ; BUFF_4.6@3553.35,3025 3510,3025 3500,3015 3500,2975
B_1C_O: BUFF_4.8 BUFF_4.9 R16.1 | length 1766.1
  Top w12: v1(3030,3005) v1(3030,3345)
  Bottom w12: R16.1@2001.57,3300 2095,3300 2140,3345 v1(3030,3345) ; v1(3030,3005) 3205,3005 3235,2975 BUFF_4.8@3346.65,2975 BUFF_4.9@3346.65,3025
B_1D_O: BUFF_4.13 BUFF_4.14 R11.1 | length 1882.2
  Top w12: v1(2075,3000) v1(2075,3425)
  Bottom w12: R11.1@2001.57,3000 v1(2075,3000) ; v1(2075,3425) 3025,3425 3175,3275 BUFF_4.14@3346.65,3275 BUFF_4.13@3346.65,3225
B_2A_O: BUFF_1.1 BUFF_1.2 | length 1557.5
  Top w12: v1(2500,3250) 2500,3575 2550,3625 v1(2550,4225)
  Bottom w12: BUFF_1.1@2431.3,3300 BUFF_1.2@2431.3,3250 v1(2500,3250) ; v1(2550,4225) 2825,4225 2900,4150 2962.01,4150
B_2B_O: BUFF_1.6 BUFF_1.7 | length 1312.7
  Top w12: v1(2425,3475) 2425,3180 2480,3125 v1(2480,3050)
  Bottom w12: v1(2425,3475) 3062.99,3475 3087.99,3500 3087.99,3550 ; BUFF_1.7@2431.3,3000 2470,3000 2480,3010 v1(2480,3050) BUFF_1.6@2431.3,3050
B_2C_O: BUFF_1.8 BUFF_1.9 | length 1020.8
  Top w12: v1(1985,2945) 1985,3040 2050,3105 2050,3300 1985,3365 v1(1985,3460)
  Bottom w12: v1(1985,2945) 2145,2945 2160,2960 2160,3000 ; v1(1985,3460) 1985,3522.01 1987.99,3525 ; BUFF_1.8@2218.7,3000 2160,3000 ; BUFF_1.9@2218.7,3050 2165,3050 2160,3045 2160,3000
B_2D_O: BUFF_1.13 | length 1695.1
  Bottom w12: v2(1562.01,3975) 1475,3975 1450,3950 1450,3275 1475,3250 2150,3250 ; BUFF_1.13@2218.7,3250 2150,3250 ; 2218.7,3300 2150,3300 2150,3250
B_3A_O: BUFF_3.1 BUFF_3.2 R_1.1 R_3.1 | length 654.4
  Bottom w12: BUFF_3.2@1628.35,5675 BUFF_3.1@1628.35,5725 1628.35,5825 1675,5871.65 1958.66,5871.65 R_3.1@1962.01,5875 R_1.1@1962.01,6025
B_4A_O: 
BOT_HB1_IN: J2.2 LS_B1.4 PWM_5.1 | length 3568.6
  Top w12: v1(2550,750) v1(2550,2225) ; PWM_5.1@4075,750 4175,650 4250,650 4325,575 J2.2@4325,450
  Bottom w12: LS_B1.4@2428.94,2225 v1(2550,2225) ; v1(2550,750) PWM_5.1@4075,750
BOT_HB2_IN: J2.5 LS_B1.10 PWM_3.1 | length 3853.2
  Top w12: v1(2275,900) v1(2275,2075) ; PWM_3.1@4375,750 4375,650 4475,550 4475,400 J2.5@4525,350
  Bottom w12: LS_B1.10@2221.06,2075 v1(2275,2075) ; v1(2275,900) 4225,900 PWM_3.1@4375,750
BOT_HB3_IN: J2.8 LS_B1.15 PWM_1.1 | length 4266
  Top w12: v1(2175,2325) 2200,2300 v1(2200,1025) ; J2.8@4625,450 4625,550 4675,600 PWM_1.1@4675,750
  Bottom w12: v1(2175,2325) LS_B1.15@2221.06,2325 ; v1(2200,1025) 2550,1025 2600,975 4450,975 PWM_1.1@4675,750
C_EMI_+: C_EMI_1.1 CIN_1.2 CY1.1 L_CM1.2 PS1.3 | length 2741.7
  Top w12: CY1.1@5244.09,6425 5825,6425 5875,6375 PS1.3@5875,6025 6000,6025 6050,6075 6144.09,6075 CIN_1.2@6150,6069.09
  Bottom w12: PS1.3@5875,6025 6277.36,6025 6525,5777.36 C_EMI_1.1@6675,5777.36 L_CM1.2@7214.37,5777.36
C_EMI_-: C_EMI_1.2 CIN_1.1 CY2.1 L_CM1.3 PS1.1 PS1.2 SW6.2 | length 2553.8
  Top w12: SW6.2@5875,4975 PS1.1@5875,5425 PS1.2@5875,5825 5994.09,5825 6000,5830.91 CIN_1.1@6150,5830.91 ; CY2.1@6150,5569.09 CIN_1.1@6150,5830.91 ; C_EMI_1.2@6675,6072.64 6550,6072.64 6308.27,5830.91 CIN_1.1@6150,5830.91
  Bottom w12: C_EMI_1.2@6675,6072.64 L_CM1.3@7214.37,6072.64
EMB3_3: IC2.1 IC5.1 J1.1 | length 584.3
  Top w12: IC2.1@8600.98,3825 8550,3825 8525,3800 8525,3625 8550,3600 IC5.1@8600.98,3600 8837.01,3600 J1.1@8837.4,3600.39
EMBGND: IC2.2 IC5.2 J1.2 | length 531.3
  Top w12: IC5.2@8600.98,3650 8650,3650 ; IC2.2@8600.98,3875 8650,3875 8675,3850 8675,3675 8650,3650 ; J1.2@8837.4,3649.61 8837.01,3650 8650,3650
ERR1_DELF: IC4.1 IC4.2 LUANCH_PAD1.5 | length 3951
  Top w12: IC4.2@550,1618.23 IC4.1@500,1618.23 500,1700 425,1775 425,2575 875,3025 v1(875,4525)
  Bottom w12: v1(875,4525) 1325,4525 1450,4650 LUANCH_PAD1.5@1600,4650
ERR2_DELF: IC4.6 IC4.7 LUANCH_PAD1.8 | length 3645
  Top w12: IC4.6@750,1618.23 IC4.7@800,1618.23 v1(800,1550) ; v1(1250,1550) 1250,2075 1325,2150 1325,4300 1375,4350 LUANCH_PAD1.8@1600,4350
  Bottom w12: v1(800,1550) v1(1250,1550)
ERR3_DELF: IC4.8 IC4.9 LUANCH_PAD1.45 | length 1124.3
  Top w12: IC4.9@750,1831.77 IC4.8@800,1831.77 800,1925 875,2000 v1(875,2150)
  Bottom w12: v1(875,2150) LUANCH_PAD1.45@1600,2150